# EAGLE board Panel 1 (EAGLE 8.4.1), part 1 of 2
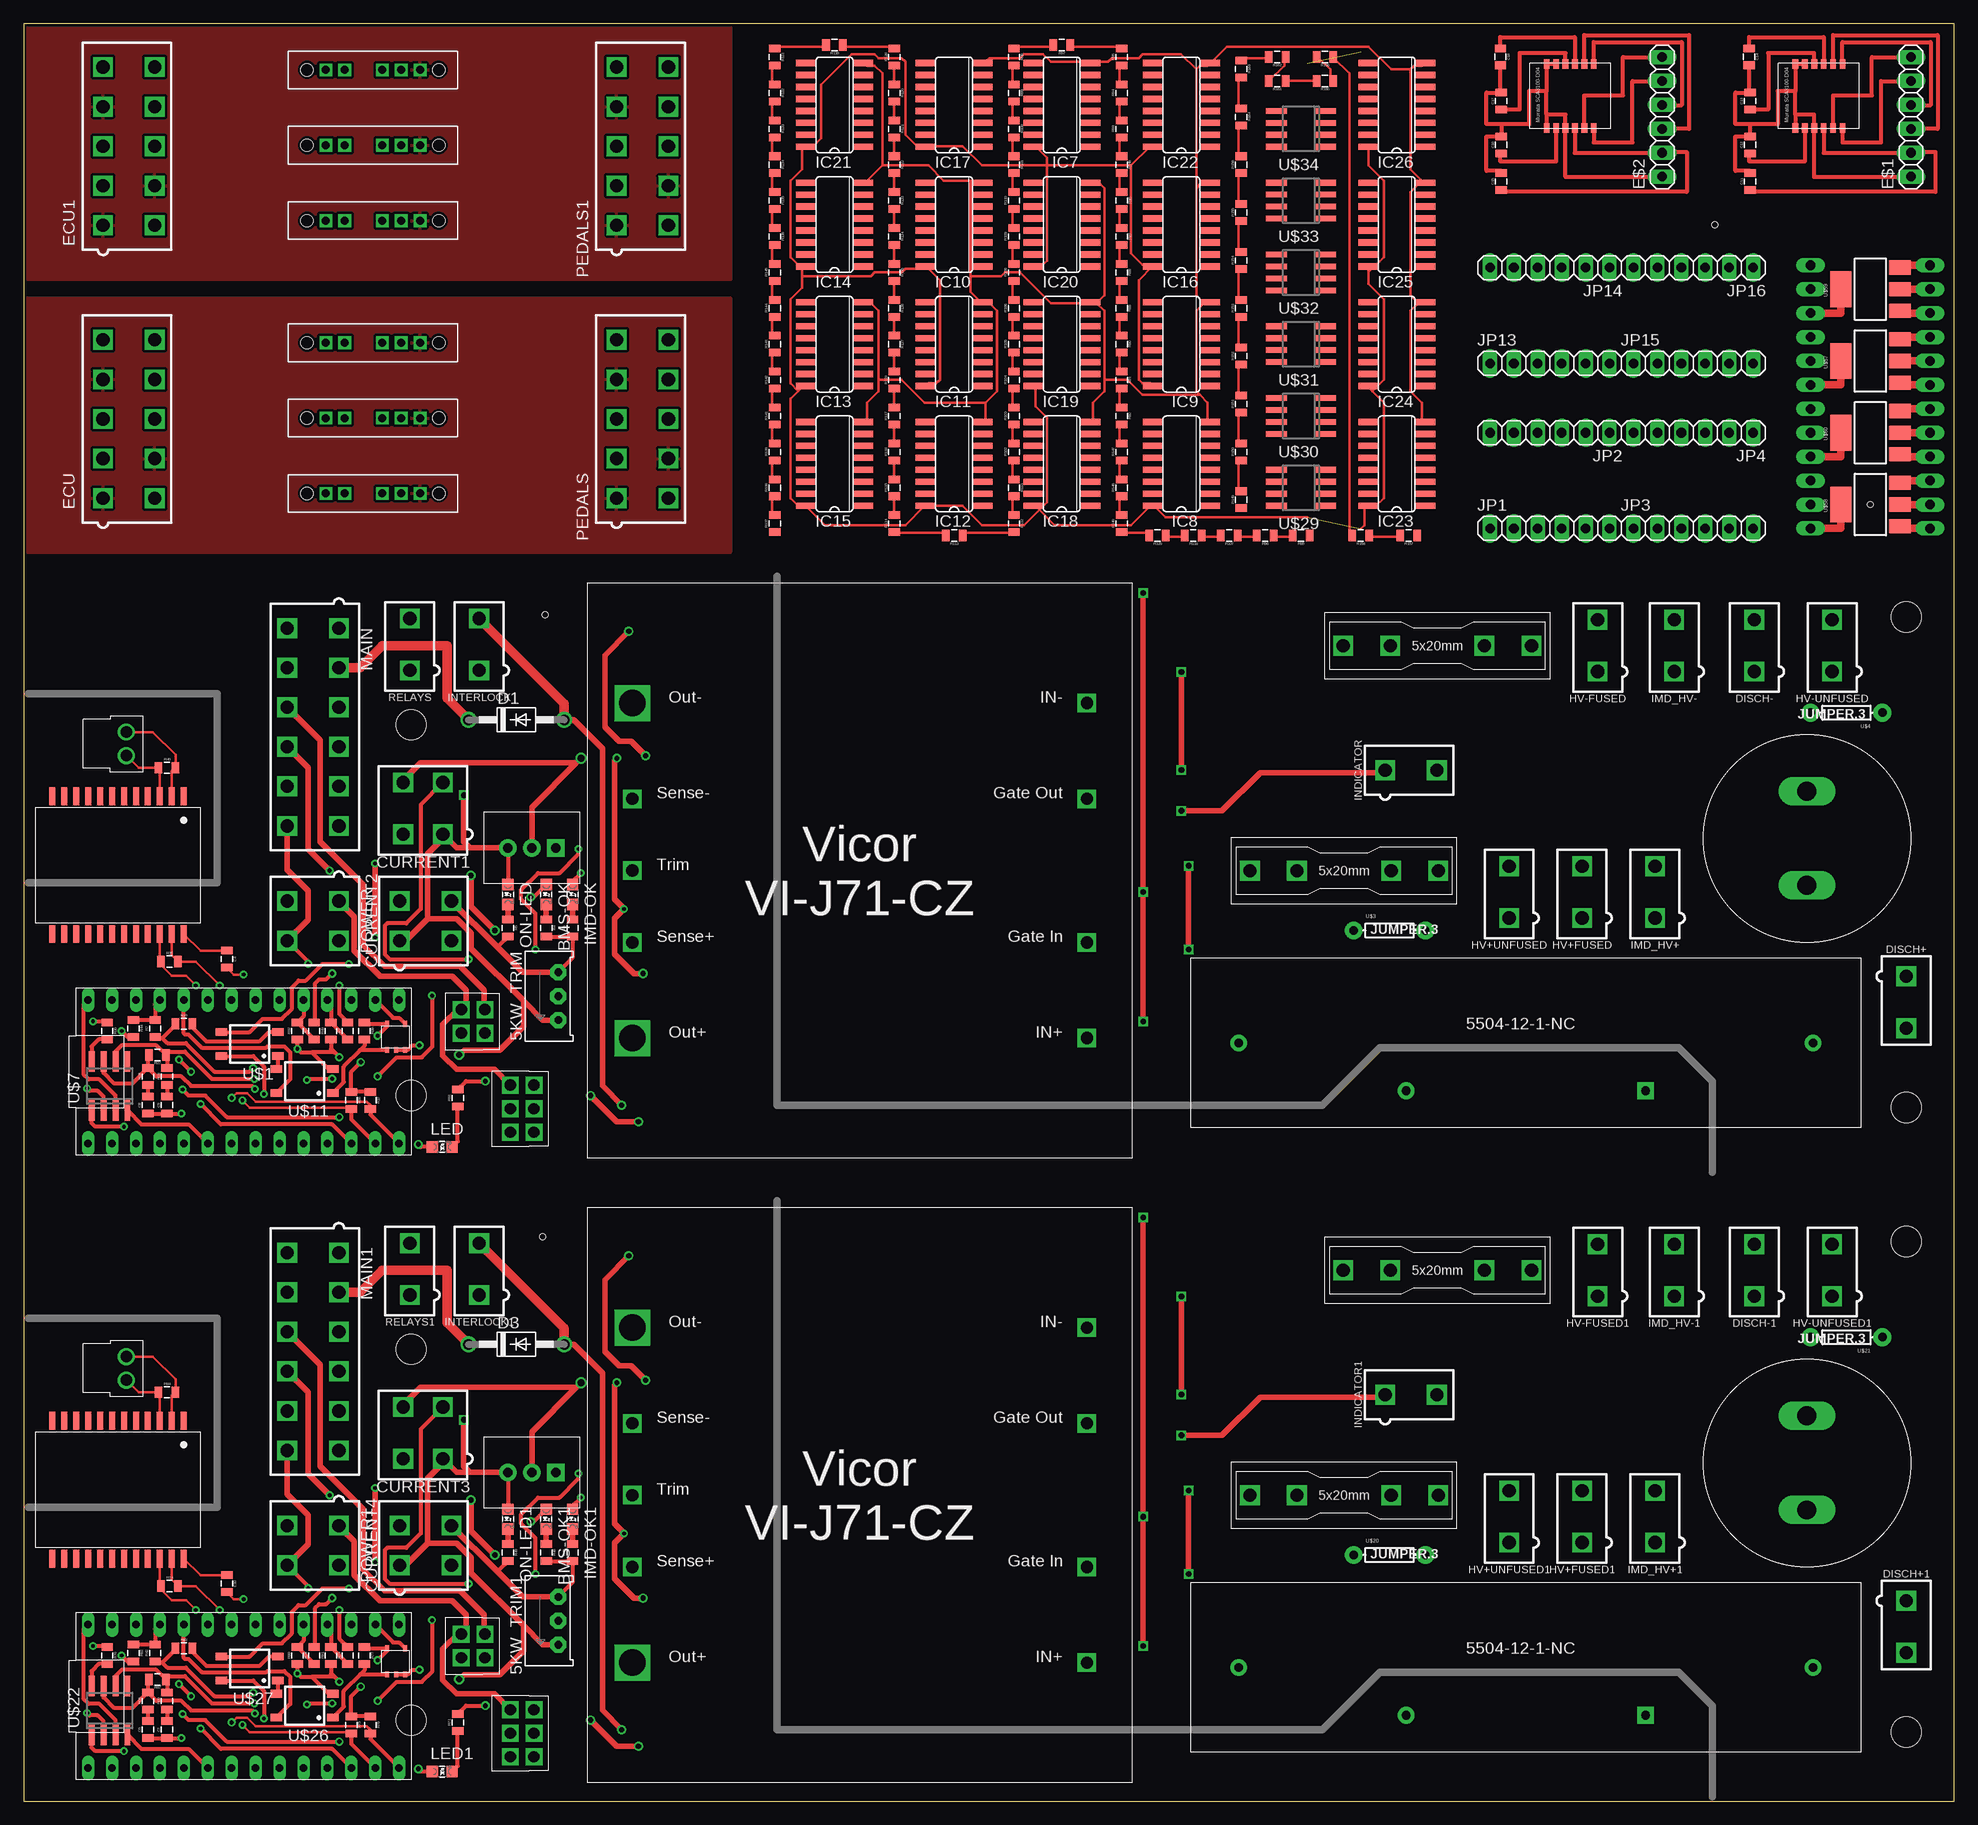
[diagram p0: board, top side]
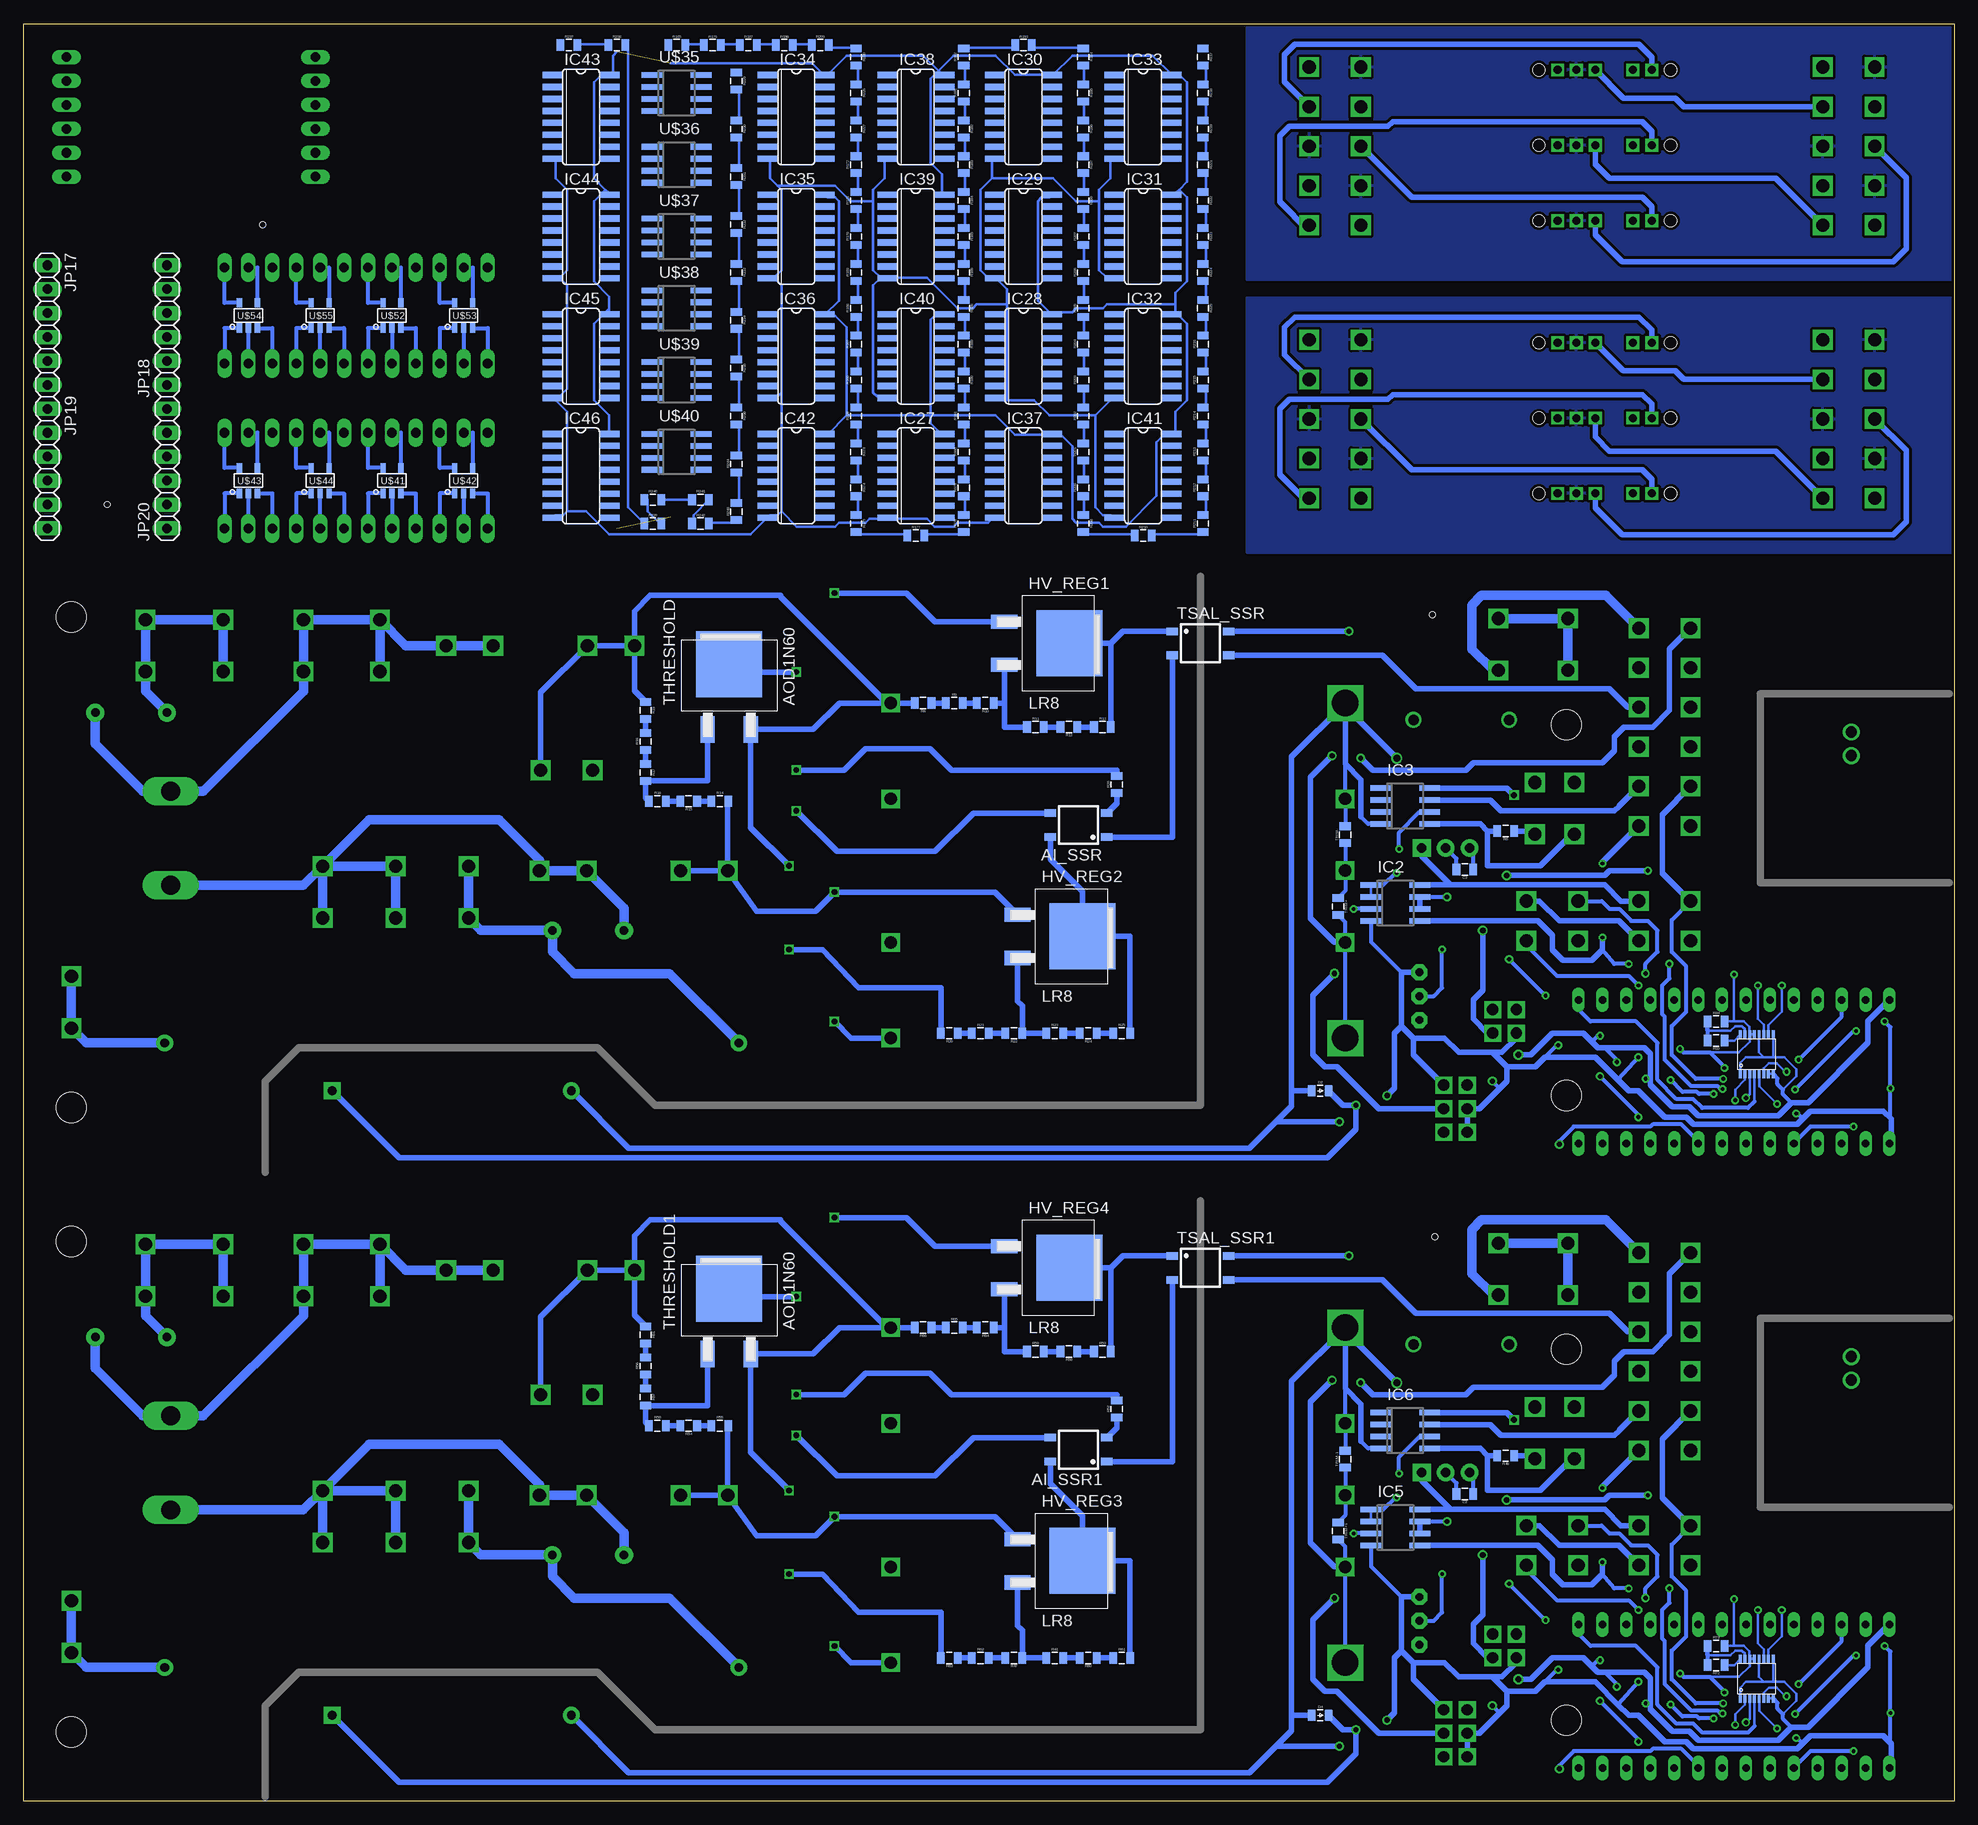
[diagram p1: board, bottom side, seen from below]

Size 204.98 x 188.72 mm. Coordinates in mm from the lower left corner, seen from the top.
Outline: 0,188.72 0,160.53 0,0 204.98,0 204.98,188.72 76.2,188.72 0,188.72
Copper layers (1*16): Top 0.035mm / dielectric 1.5mm / Bottom 0.035mm
Design rules "default *": minimum track width 6mil, minimum drill 15mil, track to track 6mil, track to pad 6mil, pad to pad 6mil, via to via 6mil, smd to smd 6mil, copper to edge 6mil, drill to drill 15mil, minimum pad ring 10mil, minimum via ring 8mil, stop-mask expansion 4mil, vias tented up to drill 0mil, thermal gap 10mil
Holes 3.2 mm at 41.15,114.3 41.15,74.93 199.9,73.66 199.9,125.73 41.15,48.01 41.15,8.64 199.9,7.37 199.9,59.44
Holes 0.64 mm at 179.58,167.39 55.37,125.98 55.12,59.94 196.09,137.67

## Footprints (pad centres in the part's own frame; a part is rotated, then mirrored left to right if it is on the bottom)
TRIMPOT_3296 = drill 0.813 pad 1.676 octagon: 1 2.54,1.27; 2 0,1.27; 3 -2.54,1.27
SOP04 = smd 0.8 x 1.2: 1 -1.27,-3; 2 1.27,-3; 3 1.27,3; 4 -1.27,3
LED-805 = smd 1.2 x 1.2: A 0,-1.05; C 0,1.05
LLS2V221MELZ = drill 2 long: P$1 -5,0; P$2 5,0
0805 = smd 0.8 x 1.2: 1 -0.9,0; 2 0.9,0
MINIFIT_5566-4 = drill 1.4 square: 1 2.1,-2.75; 2 -2.1,-2.75; 3 2.1,2.75; 4 -2.1,2.75
DO-41 = drill 1.118: A 5.08,0; C -5.08,0
0805_D = smd 0.8 x 1.2: A -0.9,0; C 0.9,0
MINIFIT_5566-2 = drill 1.4 square: 1 0,-2.75; 2 0,2.75
1X06 = drill 1.016 long: 1 -6.35,0; 2 -3.81,0; 3 -1.27,0; 4 1.27,0; 5 3.81,0; 6 6.35,0
MINIFIT_5566-10 = drill 1.4 square: 1 8.4,-2.75; 2 4.2,-2.75; 3 0,-2.75; 4 -4.2,-2.75; 5 -8.4,-2.75; 6 8.4,2.75; 7 4.2,2.75; 8 0,2.75; 9 -4.2,2.75; 10 -8.4,2.75
NANO-FIT_VERTICAL-4 = drill 1.2 square: P$1 -1.25,0; P$2 1.25,0; P$3 -1.25,2.5; P$4 1.25,2.5
0751.0110 = drill 1.4 square: L1 -10,0; L2 -5,0; R1 5,0; R2 10,0
TO-252 = smd 1.499 x 2.794: 1 -2.286,0; 3 2.286,0 | smd 7.01 x 7.01: 2(TAB) 0,6.909
TO-220 = drill 1 pad 1.88 square: 1 -2.54,0 | drill 1 pad 1.88: 2 0,0; 3 2.54,0
SOIC-08 = smd 0.6 x 2.2: 1 -1.905,-2.6; 2 -0.635,-2.6; 3 0.635,-2.6; 4 1.905,-2.6; 5 1.905,2.6; 6 0.635,2.6; 7 -0.635,2.6; 8 -1.905,2.6
SO16 = smd 0.66 x 2.032: 1 -4.445,-3.073; 2 -3.175,-3.073; 3 -1.905,-3.073; 4 -0.635,-3.073; 5 0.635,-3.073; 6 1.905,-3.073; 7 3.175,-3.073; 8 4.445,-3.073; 9 4.445,3.073; 10 3.175,3.073; 11 1.905,3.073; 12 0.635,3.073; 13 -0.635,3.073; 14 -1.905,3.073; 15 -3.175,3.073; 16 -4.445,3.073
NANO-FIT_VERTICAL-6 = drill 1.2 square: P$1 -2.5,0; P$2 0,0; P$3 2.5,0; P$4 -2.5,2.5; P$5 0,2.5; P$6 2.5,2.5
NANO-FIT_VERTICAL-2 = drill 1.2: P$1 -1.25,0; P$2 1.25,0
MINIFIT_5566-12 = drill 1.4 square: 1 10.5,-2.75; 2 6.3,-2.75; 3 2.1,-2.75; 4 -2.1,-2.75; 5 -6.3,-2.75; 6 -10.5,-2.75; 7 10.5,2.75; 8 6.3,2.75; 9 2.1,2.75; 10 -2.1,2.75; 11 -6.3,2.75; 12 -10.5,2.75
SM51589PEL = smd 0.635 x 1.905: 1 0,0; 2 1.27,0; 3 2.54,0; 4 3.81,0; 5 5.08,0; 6 6.35,0; 7 7.62,0; 8 8.89,0; 9 10.16,0; 10 11.43,0; 11 12.7,0; 12 13.97,0; 13 13.97,14.605; 14 12.7,14.605; 15 11.43,14.605; 16 10.16,14.605; 17 8.89,14.605; 18 7.62,14.605; 19 6.35,14.605; 20 5.08,14.605; 21 3.81,14.605; 22 2.54,14.605; 23 1.27,14.605; 24 0,14.605
AXIAL-0.3 = drill 0.9 pad 1.88: P$1 -3.81,0; P$2 3.81,0
HV_DCDC_VI-J71-CZ = drill 1.3 square: 1VIN+ 5.08,-12.7; 2GATEIN 5.08,-22.86; 3GATEOUT 5.08,-38.1; 4VIN- 5.08,-48.26; 6SENSE+ 53.34,-22.86; 7TRIM 53.34,-30.48; 8SENSE- 53.34,-38.1 | drill 2.8 square: 5VOUT+ 53.34,-12.7; 9VOUT- 53.34,-48.26
SS-14D0839-VG5PA = drill 0.85 square: 1 -16,6; 2 -14,6; 3 -8,6; 4 -6,6; COM -10,6 | hole 1.3: -18,6; -4,6
MSOP-16 = smd 0.305 x 0.889: 1 -0.1,-0.5; 2 0.4,-0.5; 3 0.9,-0.5; 4 1.4,-0.5; 5 1.9,-0.5; 6 2.4,-0.5; 7 2.9,-0.5; 8 3.4,-0.5; 9 3.4,3.7; 10 2.9,3.7; 11 2.4,3.7; 12 1.9,3.7; 13 1.4,3.7; 14 0.9,3.7; 15 0.4,3.7; 16 -0.1,3.7
TEENSY_3.2_SIMPLE = drill 0.8 long: 3.3V 16.51,29.21; A0 16.51,3.81; A1 16.51,6.35; A2 16.51,8.89; A3 16.51,11.43; A4 16.51,13.97; A5 16.51,16.51; A6 16.51,19.05; A7 16.51,21.59; A8 16.51,24.13; A9 16.51,26.67; AGND 16.51,31.75; D0(RX1) 1.27,31.75; D1(TX1) 1.27,29.21; D2 1.27,26.67; D3(CANTX) 1.27,24.13; D4(CANRX) 1.27,21.59; D5 1.27,19.05; D6 1.27,16.51; D7(RX3) 1.27,13.97; D8(TX3) 1.27,11.43; D9(RX2) 1.27,8.89; D10(TX2) 1.27,6.35; D11 1.27,3.81; D12 1.27,1.27; D13 16.51,1.27; GND 1.27,34.29; VIN 16.51,34.29
SOT23-5 = smd 0.61 x 0.406: EN -2.794,0; GND -2.794,0.94; VCC 0,1.905; WDI 0,0; WDO -2.794,1.905
5504-12-1-NC = drill 0.914 pad 1.778 square: COIL+ 48.26,-14.097 | drill 0.914 pad 1.778: COIL- 22.86,-14.097; CONTACT1 5.08,-9.017; CONTACT2 66.04,-9.017
SOT-23-5 = smd 1 x 0.55: 1 -1.35,0.95; 2 -1.35,0; 3 -1.35,-0.95; 4 1.35,-0.95; 5 1.35,0.95
SCA3100-D04 = smd 0.98 x 0.61: A_EXTC 0.1,-2.8; AVSS 0.1,-1.8; CSB 0.1,-5.8; D_EXTC 6.9,-3.8; DVIO 6.9,-4.8; DVSS 6.9,-2.8; EMC_GND 6.9,-1.8; MISO 0.1,-6.8; MOSI 6.9,-6.8; RESERVED 0.1,-3.8; SCK 6.9,-5.8; VDD 0.1,-4.8
SOT223 = smd 1.5 x 2.235: 1 -2.3,-3.15; 2 0,-3.15; 3 2.3,-3.15 | smd 3.8 x 2.2: 4 0,3.15

## Placement (x,y rotation side)
5KW_TRIM  [TRIMPOT_3296]  55.5,85.47 270 top
5KW_TRIM1  [TRIMPOT_3296]  55.5,19.18 270 top
AI_SSR  CPC1002N  [SOP04]  92.96,103.63 90 bottom
AI_SSR1  CPC1002N  [SOP04]  92.96,37.34 90 bottom
BMS-OK  [LED-805]  55.5,96.27 180 top
BMS-OK1  [LED-805]  55.5,29.97 180 top
C1  220uF  [LLS2V221MELZ]  189.36,102.23 90 top
C2  1uF  [0805]  51.94,32.64 180 bottom
C3  1uF  [0805]  51.94,98.93 180 bottom
C4  27pF  [0805]  21.59,89.41 270 top
C5  220uF  [LLS2V221MELZ]  189.36,35.94 90 top
C6  560pF  [0805]  13.21,7.62 90 top
C7  560pF  [0805]  15.24,7.62 90 top
C8  560pF  [0805]  13.21,73.91 90 top
C9  560pF  [0805]  15.24,73.91 90 top
C10  27pF  [0805]  21.59,23.11 270 top
C11  130 nF  [0805]  183.31,171.96 90 top
C12  130 nF  [0805]  183.31,175.85 90 top
C13  130 nF  [0805]  183.31,180.49 90 top
C14  130 nF  [0805]  183.21,185.2 270 top
C15  130 nF  [0805]  156.89,171.96 90 top
C16  130 nF  [0805]  156.89,175.85 90 top
C17  130 nF  [0805]  156.89,180.49 90 top
C18  130 nF  [0805]  156.8,185.2 270 top
CURRENT1  [MINIFIT_5566-4]  42.42,105.41 0 top
CURRENT2  [MINIFIT_5566-4]  42.67,93.47 270 top
CURRENT3  [MINIFIT_5566-4]  42.42,39.12 0 top
CURRENT4  [MINIFIT_5566-4]  42.67,27.18 270 top
D1  DIODE  [DO-41]  52.32,114.81 0 top
D2  DIODE0805  [0805_D]  67.31,75.44 0 bottom
D3  DIODE  [DO-41]  52.32,48.51 0 top
D4  DIODE0805  [0805_D]  67.31,9.14 0 bottom
DISCH+  DISCHARGE+  [MINIFIT_5566-2]  199.9,84.84 180 top
DISCH+1  DISCHARGE+  [MINIFIT_5566-2]  199.9,18.54 180 top
DISCH-  DISCHARGE -  [MINIFIT_5566-2]  183.77,122.68 0 top
DISCH-1  DISCHARGE -  [MINIFIT_5566-2]  183.77,56.39 0 top
E$1  [1X06]  200.41,178.82 90 top
E$2  [1X06]  173.99,178.82 90 top
ECU  [MINIFIT_5566-10]  11.19,146.74 270 top
ECU1  [MINIFIT_5566-10]  11.19,175.7 270 top
EM  CONNECTOR-4  [NANO-FIT_VERTICAL-4]  46.48,82.8 270 top
EM1  CONNECTOR-4  [NANO-FIT_VERTICAL-4]  46.48,16.51 270 top
FUSE  1A  [0751.0110]  140.21,98.81 180 top
FUSE1  1A  [0751.0110]  150.11,122.68 180 top
FUSE2  1A  [0751.0110]  140.21,32.51 180 top
FUSE3  1A  [0751.0110]  150.11,56.39 180 top
HV+FUSED  [MINIFIT_5566-2]  165.48,96.52 0 top
HV+FUSED1  [MINIFIT_5566-2]  165.48,30.23 0 top
HV+UNFUSED  FSAE  [MINIFIT_5566-2]  157.73,96.52 0 top
HV+UNFUSED1  FSAE  [MINIFIT_5566-2]  157.73,30.23 0 top
HV-FUSED  [MINIFIT_5566-2]  167.13,122.68 0 top
HV-FUSED1  [MINIFIT_5566-2]  167.13,56.39 0 top
HV-UNFUSED  FSAE  [MINIFIT_5566-2]  192.02,122.68 0 top
HV-UNFUSED1  FSAE  [MINIFIT_5566-2]  192.02,56.39 0 top
HV_REG1  LR8  [TO-252]  100.84,122.94 270 bottom
HV_REG2  LR8  [TO-252]  99.44,91.82 270 bottom
HV_REG3  LR8  [TO-252]  99.44,25.53 270 bottom
HV_REG4  LR8  [TO-252]  100.84,56.64 270 bottom
IC1  [TO-220]  53.98,101.22 180 top
IC2  NE5532SOIC  [SOIC-08]  59.31,95.38 270 bottom
IC3  NE5532SOIC  [SOIC-08]  58.29,105.66 270 bottom
IC4  [TO-220]  53.98,34.92 180 top
IC5  NE5532SOIC  [SOIC-08]  59.31,29.08 270 bottom
IC6  NE5532SOIC  [SOIC-08]  58.29,39.37 270 bottom
IC7  74LS258D  [SO16]  110.24,180.09 90 top
IC8  74LS258D  [SO16]  122.94,141.99 90 top
IC9  74LS258D  [SO16]  122.94,154.69 90 top
IC10  74LS258D  [SO16]  98.81,167.39 90 top
IC11  74LS258D  [SO16]  98.81,154.69 90 top
IC12  74LS258D  [SO16]  98.81,141.99 90 top
IC13  74LS258D  [SO16]  86.11,154.69 90 top
IC14  74LS258D  [SO16]  86.11,167.39 90 top
IC15  74LS258D  [SO16]  86.11,141.99 90 top
IC16  74LS258D  [SO16]  122.94,167.39 90 top
IC17  74LS258D  [SO16]  98.81,180.09 90 top
IC18  74LS258D  [SO16]  110.24,141.99 90 top
IC19  74LS258D  [SO16]  110.24,154.69 90 top
IC20  74LS258D  [SO16]  110.24,167.39 90 top
IC21  74LS258D  [SO16]  86.11,180.09 90 top
IC22  74LS258D  [SO16]  122.94,180.09 90 top
IC23  74LS258D  [SO16]  145.8,141.99 90 top
IC24  74LS258D  [SO16]  145.8,154.69 90 top
IC25  74LS258D  [SO16]  145.8,167.39 90 top
IC26  74LS258D  [SO16]  145.8,180.09 90 top
IC27  74LS258D  [SO16]  110.24,140.72 270 bottom
IC28  74LS258D  [SO16]  98.81,153.42 270 bottom
IC29  74LS258D  [SO16]  98.81,166.12 270 bottom
IC30  74LS258D  [SO16]  98.81,178.82 270 bottom
IC31  74LS258D  [SO16]  86.11,166.12 270 bottom
IC32  74LS258D  [SO16]  86.11,153.42 270 bottom
IC33  74LS258D  [SO16]  86.11,178.82 270 bottom
IC34  74LS258D  [SO16]  122.94,178.82 270 bottom
IC35  74LS258D  [SO16]  122.94,166.12 270 bottom
IC36  74LS258D  [SO16]  122.94,153.42 270 bottom
IC37  74LS258D  [SO16]  98.81,140.72 270 bottom
IC38  74LS258D  [SO16]  110.24,178.82 270 bottom
IC39  74LS258D  [SO16]  110.24,166.12 270 bottom
IC40  74LS258D  [SO16]  110.24,153.42 270 bottom
IC41  74LS258D  [SO16]  86.11,140.72 270 bottom
IC42  74LS258D  [SO16]  122.94,140.72 270 bottom
IC43  74LS258D  [SO16]  145.8,178.82 270 bottom
IC44  74LS258D  [SO16]  145.8,166.12 270 bottom
IC45  74LS258D  [SO16]  145.8,153.42 270 bottom
IC46  74LS258D  [SO16]  145.8,140.72 270 bottom
IMD  CONNECTOR-6  [NANO-FIT_VERTICAL-6]  51.69,73.53 270 top
IMD1  CONNECTOR-6  [NANO-FIT_VERTICAL-6]  51.69,7.24 270 top
IMD-OK  [LED-805]  58.29,96.27 180 top
IMD-OK1  [LED-805]  58.29,29.97 180 top
IMD_HV+  [MINIFIT_5566-2]  173.23,96.52 0 top
IMD_HV+1  [MINIFIT_5566-2]  173.23,30.23 0 top
IMD_HV-  [MINIFIT_5566-2]  175.26,122.68 0 top
IMD_HV-1  [MINIFIT_5566-2]  175.26,56.39 0 top
INDICATOR  [MINIFIT_5566-2]  147.32,109.47 270 top
INDICATOR1  [MINIFIT_5566-2]  147.32,43.18 270 top
INTERLOCK  [MINIFIT_5566-2]  48.39,122.81 0 top
INTERLOCK1  [MINIFIT_5566-2]  48.39,56.52 0 top
ISOSPI  CONNECTOR-2  [NANO-FIT_VERTICAL-2]  10.92,112.27 270 top
ISOSPI1  CONNECTOR-2  [NANO-FIT_VERTICAL-2]  10.92,45.97 270 top
JP1  [1X06]  162.05,135.13 0 top
JP2  [1X06]  162.05,145.29 180 top
JP3  [1X06]  177.29,135.13 0 top
JP4  [1X06]  177.29,145.29 180 top
JP13  [1X06]  162.05,152.65 0 top
JP14  [1X06]  162.05,162.81 180 top
JP15  [1X06]  177.29,152.65 0 top
JP16  [1X06]  177.29,162.81 180 top
JP17  [1X06]  202.44,156.72 270 bottom
JP18  [1X06]  189.74,156.72 90 bottom
JP19  [1X06]  202.44,141.48 270 bottom
JP20  [1X06]  189.74,141.48 90 bottom
LED  [LED-805]  44.45,69.47 270 top
LED1  [LED-805]  44.45,3.17 270 top
MAIN  [MINIFIT_5566-12]  30.73,114.05 90 top
MAIN1  [MINIFIT_5566-12]  30.73,47.75 90 top
ON-LED  [LED-805]  51.44,96.27 180 top
ON-LED1  [LED-805]  51.44,29.97 180 top
PEDALS  [MINIFIT_5566-10]  65.72,146.74 270 top
PEDALS1  [MINIFIT_5566-10]  65.72,175.7 270 top
POWER  [MINIFIT_5566-4]  30.73,93.47 90 top
POWER1  [MINIFIT_5566-4]  30.73,27.18 90 top
R1  1k  [0805]  30.86,81.79 90 top
R2  1k  [0805]  34.42,81.79 90 top
R3  [0805]  58.29,92.71 90 top
R4  [0805]  55.5,92.71 270 top
R5  100  [0805]  51.44,92.71 270 top
R6  10k  [0805]  47.62,103 180 bottom
R7  2k  [0805]  13.97,82.04 90 top
R8  8.2k  [0805]  109.47,116.59 180 bottom
R9  8.2k  [0805]  106.17,116.59 0 bottom
R10  8.2k  [0805]  102.87,116.59 180 bottom
R11  2k  [0805]  97.54,114.05 0 bottom
R12  2k  [0805]  93.98,114.05 180 bottom
R13  2k  [0805]  90.42,114.05 0 bottom
R14  500k  [0805]  131.06,106.17 0 bottom
R15  500k  [0805]  134.37,106.17 180 bottom
R16  500k  [0805]  137.67,106.17 0 bottom
R17  40k  [0805]  138.94,109.22 270 bottom
R18  40k  [0805]  138.94,112.52 90 bottom
R19  40k  [0805]  138.94,115.82 270 bottom
R20  20k  [0805]  106.68,81.53 180 bottom
R21  20k  [0805]  103.38,81.53 0 bottom
R22  20k  [0805]  99.82,81.53 180 bottom
R23  2k  [0805]  95.5,81.53 0 bottom
R24  2k  [0805]  91.95,81.53 180 bottom
R25  2k  [0805]  88.39,81.53 0 bottom
R26  1k  [0805]  88.9,107.95 90 bottom
R27  120  [0805]  14.22,79.25 180 top
R28  100  [0805]  13.21,76.96 90 top
R29  100  [0805]  15.24,76.96 90 top
R30  1k  [0805]  8.89,81.79 270 top
R31  [0805]  46.1,74.68 90 top
R32  2k  [0805]  29.08,81.79 90 top
R33  1k  [0805]  25.27,80.77 180 bottom
R34  1k  [0805]  25.27,82.8 0 bottom
R35  120  [0805]  15.49,89.15 0 top
R36  2k  [0805]  34.8,74.42 270 top
R37  2k  [0805]  36.83,74.42 270 top
R38  68  [0805]  36.2,81.79 270 top
R39  200  [0805]  17.02,82.55 0 top
R40  100  [0805]  15.24,109.73 0 top
R41  2k  [0805]  95.5,15.24 0 bottom
R42  2k  [0805]  13.97,15.75 90 top
R43  2k  [0805]  32.64,81.79 90 top
R44  1k  [0805]  11.68,82.04 270 top
R45  [0805]  58.29,26.42 90 top
R46  [0805]  55.5,26.42 270 top
R47  20k  [0805]  99.82,15.24 180 bottom
R48  10k  [0805]  47.62,36.7 180 bottom
R49  100  [0805]  51.44,26.42 270 top
R50  500k  [0805]  137.67,39.88 0 bottom
R51  40k  [0805]  138.94,49.53 270 bottom
R52  1k  [0805]  88.9,41.66 90 bottom
R53  2k  [0805]  90.42,47.75 0 bottom
R54  500k  [0805]  134.37,39.88 180 bottom
R55  500k  [0805]  131.06,39.88 0 bottom
R56  40k  [0805]  138.94,46.23 90 bottom
R57  40k  [0805]  138.94,42.93 270 bottom
R58  2k  [0805]  93.98,47.75 180 bottom
R59  2k  [0805]  97.54,47.75 0 bottom
R60  2k  [0805]  91.95,15.24 180 bottom
R61  2k  [0805]  88.39,15.24 0 bottom
R62  20k  [0805]  103.38,15.24 0 bottom
R63  20k  [0805]  106.68,15.24 180 bottom
R64  8.2k  [0805]  102.87,50.29 180 bottom
R65  8.2k  [0805]  106.17,50.29 0 bottom
R66  8.2k  [0805]  109.47,50.29 180 bottom
R67  120  [0805]  14.22,12.95 180 top
R68  100  [0805]  13.21,10.67 90 top
R69  100  [0805]  15.24,10.67 90 top
R70  1k  [0805]  8.89,15.49 270 top
R71  [0805]  46.1,8.38 90 top
R72  1k  [0805]  25.27,14.48 180 bottom
R73  1k  [0805]  25.27,16.51 0 bottom
R74  120  [0805]  15.49,22.86 0 top
R75  2k  [0805]  34.8,8.13 270 top
R76  2k  [0805]  36.83,8.13 270 top
R77  68  [0805]  36.2,15.49 270 top
R78  1k  [0805]  30.86,15.49 90 top
R79  1k  [0805]  34.42,15.49 90 top
R80  2k  [0805]  29.08,15.49 90 top
R81  2k  [0805]  32.64,15.49 90 top
R82  1k  [0805]  11.68,15.75 270 top
R83  200  [0805]  17.02,16.26 0 top
R84  100  [0805]  15.24,43.43 0 top
R85  [0805]  135.64,134.37 180 top
R86  [0805]  116.59,169.93 270 top
R87  [0805]  116.59,166.12 270 top
R88  [0805]  116.59,162.31 270 top
R89  [0805]  116.59,158.5 270 top
R90  [0805]  116.59,154.69 270 top
R91  [0805]  116.59,150.88 270 top
R92  [0805]  116.59,147.07 270 top
R93  [0805]  116.59,177.55 90 top
R94  [0805]  116.59,181.36 90 top
R95  [0805]  116.59,185.17 90 top
R96  [0805]  131.83,134.37 180 top
R97  [0805]  110.24,186.44 180 top
R98  [0805]  105.16,185.17 270 top
R99  [0805]  105.16,181.36 270 top
R100  [0805]  105.16,177.55 270 top
R101  [0805]  105.16,173.74 270 top
R102  [0805]  105.16,143.26 90 top
R103  [0805]  105.16,147.07 90 top
R104  [0805]  105.16,150.88 90 top
R105  [0805]  105.16,154.69 90 top
R106  [0805]  105.16,158.5 90 top
R107  [0805]  128.02,134.37 180 top
R108  [0805]  105.16,162.31 90 top
R109  [0805]  105.16,166.12 90 top
R110  [0805]  105.16,169.93 90 top
R111  [0805]  105.16,139.45 270 top
R112  [0805]  105.16,135.64 270 top
R113  [0805]  98.81,134.37 180 top
R114  [0805]  92.46,135.64 90 top
R115  [0805]  92.46,139.45 90 top
R116  [0805]  92.46,143.26 90 top
R117  [0805]  92.46,147.07 90 top
R118  [0805]  124.21,134.37 180 top
R119  [0805]  92.46,150.88 90 top
R120  [0805]  92.46,181.36 270 top
R121  [0805]  92.46,177.55 270 top
R122  [0805]  92.46,173.74 270 top
R123  [0805]  92.46,169.93 270 top
R124  [0805]  92.46,166.12 270 top
R125  [0805]  92.46,162.31 270 top
R126  [0805]  92.46,158.5 270 top
R127  [0805]  92.46,154.69 270 top
R128  [0805]  92.46,185.17 90 top
R129  [0805]  120.4,134.37 180 top
R130  [0805]  86.11,186.44 180 top
R131  [0805]  79.76,185.17 270 top
R132  [0805]  79.76,181.36 270 top
R133  [0805]  79.76,177.55 270 top
R134  [0805]  79.76,173.74 270 top
R135  [0805]  79.76,169.93 270 top
R136  [0805]  79.76,166.12 270 top
R137  [0805]  79.76,135.64 90 top
R138  [0805]  79.76,139.45 90 top
R139  [0805]  79.76,143.26 90 top
R140  [0805]  116.59,135.64 90 top
R141  [0805]  79.76,147.07 90 top
R142  [0805]  79.76,150.88 90 top
R143  [0805]  79.76,154.69 90 top
R144  [0805]  79.76,158.5 90 top
R145  [0805]  79.76,162.31 90 top
R146  [0805]  116.59,139.45 90 top
R147  [0805]  116.59,143.26 90 top
R148  [0805]  116.59,173.74 270 top
R149  [0805]  129.29,138.18 90 top
R150  [0805]  129.29,143.26 90 top
R151  [0805]  129.29,148.34 90 top
R152  [0805]  129.29,153.42 90 top
R153  [0805]  129.29,158.5 90 top
R154  [0805]  129.29,163.58 90 top
R155  [0805]  129.29,168.66 90 top
R156  [0805]  129.29,173.74 90 top
R157  [0805]  147.07,134.37 180 top
R158  [0805]  141.99,134.37 180 top
R159  [0805]  138.18,185.17 180 top
R160  [0805]  138.18,182.63 180 top
R161  [0805]  133.1,182.63 180 top
R162  [0805]  133.1,185.17 180 top
R163  [0805]  129.29,183.9 270 top
R164  [0805]  129.29,178.82 270 top
R165  [0805]  135.64,186.44 0 bottom
R166  [0805]  116.59,150.88 90 bottom
R167  [0805]  116.59,154.69 90 bottom
R168  [0805]  116.59,158.5 90 bottom
R169  [0805]  116.59,162.31 90 bottom
R170  [0805]  116.59,166.12 90 bottom
R171  [0805]  116.59,169.93 90 bottom
R172  [0805]  116.59,173.74 90 bottom
R173  [0805]  116.59,143.26 270 bottom
R174  [0805]  116.59,139.45 270 bottom
R175  [0805]  116.59,135.64 270 bottom
R176  [0805]  131.83,186.44 0 bottom
R177  [0805]  110.24,134.37 0 bottom
R178  [0805]  105.16,135.64 90 bottom
R179  [0805]  105.16,139.45 90 bottom
R180  [0805]  105.16,143.26 90 bottom
R181  [0805]  105.16,147.07 90 bottom
R182  [0805]  105.16,177.55 270 bottom
R183  [0805]  105.16,173.74 270 bottom
R184  [0805]  105.16,169.93 270 bottom
R185  [0805]  105.16,166.12 270 bottom
R186  [0805]  105.16,162.31 270 bottom
R187  [0805]  128.02,186.44 0 bottom
R188  [0805]  105.16,158.5 270 bottom
R189  [0805]  105.16,154.69 270 bottom
R190  [0805]  105.16,150.88 270 bottom
R191  [0805]  105.16,181.36 90 bottom
R192  [0805]  105.16,185.17 90 bottom
R193  [0805]  98.81,186.44 0 bottom
R194  [0805]  92.46,185.17 270 bottom
R195  [0805]  92.46,181.36 270 bottom
R196  [0805]  92.46,177.55 270 bottom
R197  [0805]  92.46,173.74 270 bottom
R198  [0805]  124.21,186.44 0 bottom
R199  [0805]  92.46,169.93 270 bottom
R200  [0805]  92.46,139.45 90 bottom
R201  [0805]  92.46,143.26 90 bottom
R202  [0805]  92.46,147.07 90 bottom
R203  [0805]  92.46,150.88 90 bottom
R204  [0805]  92.46,154.69 90 bottom
R205  [0805]  92.46,158.5 90 bottom
R206  [0805]  92.46,162.31 90 bottom
R207  [0805]  92.46,166.12 90 bottom
R208  [0805]  92.46,135.64 270 bottom
R209  [0805]  120.4,186.44 0 bottom
R210  [0805]  86.11,134.37 0 bottom
R211  [0805]  79.76,135.64 90 bottom
R212  [0805]  79.76,139.45 90 bottom
R213  [0805]  79.76,143.26 90 bottom
R214  [0805]  79.76,147.07 90 bottom
R215  [0805]  79.76,150.88 90 bottom
R216  [0805]  79.76,154.69 90 bottom
R217  [0805]  79.76,185.17 270 bottom
R218  [0805]  79.76,181.36 270 bottom
R219  [0805]  79.76,177.55 270 bottom
R220  [0805]  116.59,185.17 270 bottom
R221  [0805]  79.76,173.74 270 bottom
R222  [0805]  79.76,169.93 270 bottom
R223  [0805]  79.76,166.12 270 bottom
R224  [0805]  79.76,162.31 270 bottom
R225  [0805]  79.76,158.5 270 bottom
R226  [0805]  116.59,181.36 270 bottom
R227  [0805]  116.59,177.55 270 bottom
R228  [0805]  116.59,147.07 90 bottom
R229  [0805]  129.29,182.63 270 bottom
R230  [0805]  129.29,177.55 270 bottom
R231  [0805]  129.29,172.47 270 bottom
R232  [0805]  129.29,167.39 270 bottom
R233  [0805]  129.29,162.31 270 bottom
R234  [0805]  129.29,157.23 270 bottom
R235  [0805]  129.29,152.15 270 bottom
R236  [0805]  129.29,147.07 270 bottom
R237  [0805]  147.07,186.44 0 bottom
R238  [0805]  141.99,186.44 0 bottom
R239  [0805]  138.18,135.64 0 bottom
R240  [0805]  138.18,138.18 0 bottom
R241  [0805]  133.1,138.18 0 bottom
R242  [0805]  133.1,135.64 0 bottom
R243  [0805]  129.29,136.91 90 bottom
R244  [0805]  129.29,141.99 90 bottom
RELAYS  [MINIFIT_5566-2]  41.02,122.81 0 top
RELAYS1  [MINIFIT_5566-2]  41.02,56.52 0 top
THRESHOLD  AOD1N60  [TO-252]  130.05,113.79 0 bottom
THRESHOLD1  AOD1N60  [TO-252]  130.05,47.5 0 bottom
TRIM+  [0805]  65.41,95 270 bottom
TRIM+1  [0805]  65.41,28.7 270 bottom
TRIM-  [0805]  64.64,102.62 90 bottom
TRIM-1  [0805]  64.64,36.32 90 bottom
TSAL_SSR  CPC1002N  [SOP04]  80.01,122.94 270 bottom
TSAL_SSR1  CPC1002N  [SOP04]  80.01,56.64 270 bottom
U$1  [SOP04]  24,80.39 90 top
U$2  SM51589PEL  [SM51589PEL]  17.02,106.68 180 top
U$3  JUMPER.3  [AXIAL-0.3]  145.03,92.46 0 top
U$4  JUMPER.3  [AXIAL-0.3]  193.55,115.57 180 top
U$5  HV_DCDC_VI-J71-CZ  [HV_DCDC_VI-J71-CZ]  117.98,68.33 180 top
U$6  SS-14D0839-VG5PA  [SS-14D0839-VG5PA]  48.1,148.84 0 top
U$7  MCP2551  [SOIC-08]  9.14,75.95 0 top
U$8  LTC6820  [MSOP-16]  22.61,77.72 0 bottom
U$9  TEENSY_3.2_SIMPLE  [TEENSY_3.2_SIMPLE]  41.15,68.58 90 top
U$10  STWD100  [SOT23-5]  40.51,82.55 90 top
U$11  [SOP04]  29.84,76.45 90 top
U$12  5504-12-1-NC  [5504-12-1-NC]  123.95,89.53 0 top
U$13  SS-14D0839-VG5PA  [SS-14D0839-VG5PA]  48.1,140.84 0 top
U$14  SS-14D0839-VG5PA  [SS-14D0839-VG5PA]  48.1,132.84 0 top
U$15  SS-14D0839-VG5PA  [SS-14D0839-VG5PA]  48.1,177.8 0 top
U$16  SS-14D0839-VG5PA  [SS-14D0839-VG5PA]  48.1,169.8 0 top
U$17  SS-14D0839-VG5PA  [SS-14D0839-VG5PA]  48.1,161.8 0 top
U$18  5504-12-1-NC  [5504-12-1-NC]  123.95,23.24 0 top
U$19  HV_DCDC_VI-J71-CZ  [HV_DCDC_VI-J71-CZ]  117.98,2.03 180 top
U$20  JUMPER.3  [AXIAL-0.3]  145.03,26.16 0 top
U$21  JUMPER.3  [AXIAL-0.3]  193.55,49.28 180 top
U$22  MCP2551  [SOIC-08]  9.14,9.65 0 top
U$23  LTC6820  [MSOP-16]  22.61,11.43 0 bottom
U$24  TEENSY_3.2_SIMPLE  [TEENSY_3.2_SIMPLE]  41.15,2.29 90 top
U$25  STWD100  [SOT23-5]  40.51,16.26 90 top
U$26  [SOP04]  29.84,10.16 90 top
U$27  [SOP04]  24,14.1 90 top
U$28  SM51589PEL  [SM51589PEL]  17.02,40.39 180 top
U$29  MCP2551  [SOIC-08]  135.64,139.45 90 top
U$30  MCP2551  [SOIC-08]  135.64,147.07 90 top
U$31  MCP2551  [SOIC-08]  135.64,154.69 90 top
U$32  MCP2551  [SOIC-08]  135.64,162.31 90 top
U$33  MCP2551  [SOIC-08]  135.64,169.93 90 top
U$34  MCP2551  [SOIC-08]  135.64,177.55 90 top
U$35  MCP2551  [SOIC-08]  135.64,181.36 270 bottom
U$36  MCP2551  [SOIC-08]  135.64,173.74 270 bottom
U$37  MCP2551  [SOIC-08]  135.64,166.12 270 bottom
U$38  MCP2551  [SOIC-08]  135.64,158.5 270 bottom
U$39  MCP2551  [SOIC-08]  135.64,150.88 270 bottom
U$40  MCP2551  [SOIC-08]  135.64,143.26 270 bottom
U$41  SN74LVC1G06  [SOT-23-5]  165.86,140.21 90 bottom
U$42  SN74LVC1G07  [SOT-23-5]  158.24,140.21 90 bottom
U$43  SN74LVC1G06  [SOT-23-5]  181.1,140.21 90 bottom
U$44  SN74LVC1G07  [SOT-23-5]  173.48,140.21 90 bottom
U$45  SCA3100-D04  [SCA3100-D04]  186.33,177.53 90 top
U$52  SN74LVC1G06  [SOT-23-5]  165.86,157.73 90 bottom
U$53  SN74LVC1G07  [SOT-23-5]  158.24,157.73 90 bottom
U$54  SN74LVC1G06  [SOT-23-5]  181.1,157.73 90 bottom
U$55  SN74LVC1G07  [SOT-23-5]  173.48,157.73 90 bottom
U$56  SCA3100-D04  [SCA3100-D04]  159.91,177.53 90 top
U$57  SOT223  [SOT223]  196.09,152.91 90 top
U$58  SOT223  [SOT223]  196.09,137.67 90 top
U$59  SOT223  [SOT223]  196.09,160.53 90 top
U$60  SOT223  [SOT223]  196.09,145.29 90 top

## Library data of the parts
5KW_TRIM 5KW_TRIM1 AI_SSR AI_SSR1 BMS-OK BMS-OK1 C1-C18 D1-D4 E$1 E$2 EM EM1 FUSE FUSE1-FUSE3 HV_REG1-HV_REG4 IC1-IC6 IMD IMD1 IMD-OK IMD-OK1 ISOSPI ISOSPI1 JP1-JP4 JP13-JP20 LED LED1 ON-LED ON-LED1 R1-R244 THRESHOLD THRESHOLD1 TRIM+ TRIM+1 TRIM- TRIM-1 TSAL_SSR TSAL_SSR1 U$1-U$45 U$52-U$60 = HyTechDevices
CURRENT1-CURRENT4 ECU ECU1 MAIN MAIN1 PEDALS PEDALS1 POWER POWER1 = HyTechDevices; OC_FARNELL: unknown; OC_NEWARK: unknown
DISCH+ DISCH+1 DISCH- DISCH-1 HV+FUSED HV+FUSED1 HV+UNFUSED HV+UNFUSED1 HV-FUSED HV-FUSED1 HV-UNFUSED HV-UNFUSED1 IMD_HV+ IMD_HV+1 IMD_HV- IMD_HV-1 INDICATOR INDICATOR1 INTERLOCK INTERLOCK1 RELAYS RELAYS1 = HyTechDevices; OC_FARNELL: 1822072; OC_NEWARK: unknown
IC7-IC46 = 74xx-us

## Nets
5KW_TRIG: 5KW_TRIM.2 IC3.6
5KW_TRIG1: 5KW_TRIM1.2 IC6.6
+3V1: U$23.6 U$24.3.3V
+3V3: U$8.6 U$9.3.3V
+5V: 5KW_TRIM.1 C3.1 CURRENT1.1 CURRENT2.1 IC1.3 IC3.8 ON-LED.A R6.1 R36.1 R37.1 R38.1 U$1.4 U$7.3 U$8.1 U$8.7 U$8.8 U$8.9 U$8.12 U$9.VIN U$10.VCC
+5V1: ECU.1 ECU.4 ECU.7 PEDALS.1 PEDALS.4 PEDALS.7 U$6.4 U$13.4 U$14.4
+5V3: 5KW_TRIM1.1 C2.1 CURRENT3.1 CURRENT4.1 IC4.3 IC6.8 ON-LED1.A R48.1 R75.1 R76.1 R77.1 U$22.3 U$23.1 U$23.7 U$23.8 U$23.9 U$23.12 U$24.VIN U$25.VCC U$27.4
+5V4: ECU1.1 ECU1.4 ECU1.7 PEDALS1.1 PEDALS1.4 PEDALS1.7 U$15.4 U$16.4 U$17.4
+12V: EM.P$1 IC1.1 IC2.8 IMD.P$1 POWER.1
+12V1: EM1.P$1 IC4.1 IC5.8 IMD1.P$1 POWER1.1
BMS_OK: IC2.5 MAIN.6 U$1.3
BMS_OK1: IC5.5 MAIN1.6 U$27.3
BMS_WATCH: U$1.1 U$11.3
BMS_WATCH1: U$26.3 U$27.1
BSPD_CUR_FAULT: IC3.7 MAIN.5
BSPD_CUR_FAULT1: IC6.7 MAIN1.5
CANH: MAIN.12 POWER.4 R27.2 R28.2 U$7.7
CANH1: MAIN1.12 POWER1.4 R67.2 R68.2 U$22.7
CANL: MAIN.11 POWER.3 R27.1 R29.2 U$7.6
CANL1: MAIN1.11 POWER1.3 R67.1 R69.2 U$22.6
CS: U$8.5 U$9.D10(TX2)
CS1: U$23.5 U$24.D10(TX2)
CUR_SENSE_1: CURRENT1.2 IC3.5 R6.2
CUR_SENSE_2: R1.1 R32.2 U$9.A3
CUR_SENSE_3: CURRENT3.2 IC6.5 R48.2
CUR_SENSE_4: R78.1 R80.2 U$24.A3
DISCHARGE1: HV+UNFUSED.1 HV+UNFUSED.2 U$3.P$2 U$12.CONTACT1
DISCHARGE2: DISCH+.1 DISCH+.2 U$12.CONTACT2
DISCHARGE3: DISCH-.1 DISCH-.2 HV-UNFUSED.1 HV-UNFUSED.2 U$4.P$2
DISCHARGE4: DISCH+1.1 DISCH+1.2 U$18.CONTACT2
DISCHARGE5: HV+UNFUSED1.1 HV+UNFUSED1.2 U$18.CONTACT1 U$20.P$2
DISCHARGE6: DISCH-1.1 DISCH-1.2 HV-UNFUSED1.1 HV-UNFUSED1.2 U$21.P$2
EM_IO1: EM.P$3 MAIN.9
EM_IO2: EM.P$4 MAIN.10
EM_IO3: EM1.P$3 MAIN1.9
EM_IO4: EM1.P$4 MAIN1.10
GND: 5KW_TRIM.3 C3.2 C4.2 C8.1 C9.1 CURRENT1.4 CURRENT2.4 D2.A EM.P$2 IC1.2 IC2.4 IC3.4 IMD.P$2 IMD.P$3 IMD.P$4 POWER.2 R3.1 R4.2 R5.2 R7.1 R30.1 R31.2 R32.1 R34.2 R39.1 R43.1 TRIM-.2 U$5.8SENSE- U$5.9VOUT- U$7.2 U$8.13 U$8.14 U$9.GND U$10.EN U$10.GND U$11.2 U$12.COIL-
GND1: ECU.2 ECU.5 ECU.8 PEDALS.2 PEDALS.5 PEDALS.8 U$6.3 U$13.3 U$14.3
GND2: ECU1.2 ECU1.5 ECU1.8 PEDALS1.2 PEDALS1.5 PEDALS1.8 U$15.3 U$16.3 U$17.3
GND3: 5KW_TRIM1.3 C2.2 C6.1 C7.1 C10.2 CURRENT3.4 CURRENT4.4 D4.A EM1.P$2 IC4.2 IC5.4 IC6.4 IMD1.P$2 IMD1.P$3 IMD1.P$4 POWER1.2 R42.1 R45.1 R46.2 R49.2 R70.1 R71.2 R73.2 R80.1 R81.1 R83.1 TRIM-1.2 U$18.COIL- U$19.8SENSE- U$19.9VOUT- U$22.2 U$23.13 U$23.14 U$24.GND U$25.EN U$25.GND U$26.2
GND4: IC7.8 IC8.8 IC9.8 IC10.8 IC11.8 IC12.8 IC13.8 IC14.8 IC15.8 IC16.8 IC17.8 IC18.8 IC19.8 IC20.8 IC21.8 IC22.8 IC23.8 IC24.8 IC25.8 IC26.8
GND5: IC27.8 IC28.8 IC29.8 IC30.8 IC31.8 IC32.8 IC33.8 IC34.8 IC35.8 IC36.8 IC37.8 IC38.8 IC39.8 IC40.8 IC41.8 IC42.8 IC43.8 IC44.8 IC45.8 IC46.8
GND6: C11.2 C12.2 C13.2 C14.2 U$45.AVSS U$45.DVSS U$45.EMC_GND U$45.RESERVED
GND7: C15.2 C16.2 C17.2 C18.2 U$56.AVSS U$56.DVSS U$56.EMC_GND U$56.RESERVED
HV+FUSED: C1.P$1 FUSE.L1 FUSE.L2 HV+FUSED.1 HV+FUSED.2 IMD_HV+.1 IMD_HV+.2 U$3.P$1
HV+FUSED1: C5.P$1 FUSE2.L1 FUSE2.L2 HV+FUSED1.1 HV+FUSED1.2 IMD_HV+1.1 IMD_HV+1.2 U$20.P$1
HV+FUSED_1A: FUSE.R1 FUSE.R2 HV_REG1.1 HV_REG2.1 R14.2 U$5.1VIN+
HV+FUSED_1A1: FUSE2.R1 FUSE2.R2 HV_REG3.1 HV_REG4.1 R55.2 U$19.1VIN+
HV-FUSED: C1.P$2 FUSE1.L1 FUSE1.L2 HV-FUSED.1 HV-FUSED.2 IMD_HV-.1 IMD_HV-.2 U$4.P$1
HV-FUSED1: C5.P$2 FUSE3.L1 FUSE3.L2 HV-FUSED1.1 HV-FUSED1.2 IMD_HV-1.1 IMD_HV-1.2 U$21.P$1
HV-FUSED_1A: FUSE1.R1 FUSE1.R2 INDICATOR.2 R8.2 R19.1 R20.2 THRESHOLD.3 U$5.4VIN-
HV-FUSED_1A1: FUSE3.R1 FUSE3.R2 INDICATOR1.2 R51.1 R63.2 R66.2 THRESHOLD1.3 U$19.4VIN-
ISOSPI-M: ISOSPI.P$2 R40.1 U$2.3
ISOSPI-M1: ISOSPI1.P$2 R84.1 U$28.3
ISOSPI-P: ISOSPI.P$1 R40.2 U$2.2
ISOSPI-P1: ISOSPI1.P$1 R84.2 U$28.2
MISO: R37.2 U$8.3 U$9.D12
MISO1: R76.2 U$23.3 U$24.D12
MOSI: R36.2 U$8.2 U$9.D11
MOSI1: R75.2 U$23.2 U$24.D11
N$1: AI_SSR.4 HV_REG2.2(TAB) R25.2
N$2: HV_REG1.2(TAB) R13.2 TSAL_SSR.1
N$3: ON-LED.C R5.1
N$4: R39.2 U$1.2
N$5: AI_SSR.2 R26.1
N$6: AI_SSR.1 TSAL_SSR.2
N$7: AI_SSR.3 INDICATOR.1
N$8: R8.1 R9.1
N$9: R26.2 THRESHOLD.2(TAB)
N$10: R14.1 R15.1
N$11: R15.2 R16.2
N$12: R17.1 R18.1
N$13: R18.2 R19.2
N$14: R9.2 R10.2
N$15: HV_REG2.3 R22.1 R23.1
N$16: R11.2 R12.2
N$17: R12.1 R13.1
N$18: HV_REG1.3 R10.1 R11.1
N$19: R23.2 R24.2
N$20: R24.1 R25.1
N$21: R21.2 R22.2
N$22: R16.1 R17.2 THRESHOLD.1
N$23: R20.1 R21.1
N$24: ECU.9 U$6.COM
N$25: U$7.1 U$9.D3(CANTX)
N$26: R30.2 U$7.8
N$27: C8.2 R28.1
N$28: C9.2 R29.1
N$29: LED.C R31.1
N$30: CURRENT2.2 R1.2
N$31: R33.1 U$8.16
N$32: R33.2 R34.1 U$8.15
N$33: R35.1 U$2.22 U$8.10
N$34: R35.2 U$2.23 U$8.11
N$35: C4.1 U$2.24
N$36: U$7.4 U$9.D4(CANRX)
N$37: LED.A U$9.D7(RX3)
N$38: R38.2 U$10.WDO U$11.1
N$39: ECU.6 U$13.COM
N$40: U$9.A8 U$11.4
N$41: ECU.3 U$14.COM
N$42: IC2.1 IC2.2 IMD-OK.A
N$43: BMS-OK.A IC2.6 IC2.7
N$44: BMS-OK.C R4.1
N$45: IMD-OK.C R3.2
N$46: PEDALS.9 U$6.1
N$47: PEDALS.6 U$13.1
N$48: PEDALS.3 U$14.1
N$49: ECU1.9 U$15.COM
N$50: U$9.A0 U$10.WDI
N$51: ECU1.6 U$16.COM
N$52: ECU1.3 U$17.COM
N$53: CURRENT1.3 R44.2
N$54: CURRENT2.3 R2.2
N$55: PEDALS1.9 U$15.1
N$56: PEDALS1.6 U$16.1
N$57: PEDALS1.3 U$17.1
N$58: AI_SSR1.4 HV_REG3.2(TAB) R61.2
N$59: HV_REG3.3 R41.1 R47.1
N$60: IC5.1 IC5.2 IMD-OK1.A
N$61: BMS-OK1.A IC5.6 IC5.7
N$62: BMS-OK1.C R46.1
N$63: IMD-OK1.C R45.2
N$64: ON-LED1.C R49.1
N$65: HV_REG4.2(TAB) R53.2 TSAL_SSR1.1
N$66: R54.1 R55.1
N$67: R50.2 R54.2
N$68: R56.1 R57.1
N$69: R51.2 R56.2
N$70: AI_SSR1.2 R52.1
N$71: AI_SSR1.1 TSAL_SSR1.2
N$72: AI_SSR1.3 INDICATOR1.1
N$73: HV_REG4.3 R59.1 R64.1
N$74: R64.2 R65.2
N$75: R65.1 R66.1
N$76: R50.1 R57.2 THRESHOLD1.1
N$77: R58.2 R59.2
N$78: R53.1 R58.1
N$79: R52.2 THRESHOLD1.2(TAB)
N$80: R41.2 R60.2
N$81: R60.1 R61.1
N$82: R47.2 R62.2
N$83: R62.1 R63.1
N$84: U$22.1 U$24.D3(CANTX)
N$85: R70.2 U$22.8
N$86: C6.2 R68.1
N$87: C7.2 R69.1
N$88: LED1.C R71.1
N$89: R72.1 U$23.16
N$90: R72.2 R73.1 U$23.15
N$91: R74.1 U$23.10 U$28.22
N$92: R74.2 U$23.11 U$28.23
N$93: C10.1 U$28.24
N$94: U$22.4 U$24.D4(CANRX)
N$95: LED1.A U$24.D7(RX3)
N$96: R77.2 U$25.WDO U$26.1
N$97: U$24.A8 U$26.4
N$98: U$24.A0 U$25.WDI
N$99: CURRENT4.2 R78.2
N$100: CURRENT4.3 R79.2
N$101: CURRENT3.3 R82.2
N$102: R83.2 U$27.2
N$103: R85.2 R96.1
N$104: R96.2 R107.1
N$105: R107.2 R118.1
N$106: R129.2 R140.1
N$107: R140.2 R146.1
N$108: R146.2 R147.1
N$109: R118.2 R129.1
N$110: R86.1 R148.2
N$111: R86.2 R87.1
N$112: R87.2 R88.1
N$113: R89.2 R90.1
N$114: R90.2 R91.1
N$115: R91.2 R92.1
N$116: R88.2 R89.1
N$117: R92.2 R147.2
N$118: R93.2 R94.1
N$119: R94.2 R95.1
N$120: R95.2 R97.1
N$121: R98.2 R99.1
N$122: R99.2 R100.1
N$123: R100.2 R101.1
N$124: R97.2 R98.1
N$125: R102.2 R103.1
N$126: R103.2 R104.1
N$127: R104.2 R105.1
N$128: R106.2 R108.1
N$129: R108.2 R109.1
N$130: R109.2 R110.1
N$131: R105.2 R106.1
N$132: R101.2 R110.2
N$133: R93.1 R148.1
N$134: R111.2 R112.1
N$135: R112.2 R113.1
N$136: R113.2 R114.1
N$137: R115.2 R116.1
N$138: R116.2 R117.1
N$139: R117.2 R119.1
N$140: R114.2 R115.1
N$141: R120.2 R121.1
N$142: R121.2 R122.1
N$143: R122.2 R123.1
N$144: R124.2 R125.1
N$145: R125.2 R126.1
N$146: R126.2 R127.1
N$147: R123.2 R124.1
N$148: R119.2 R127.2
N$149: R128.2 R130.1
N$150: R130.2 R131.1
N$151: R131.2 R132.1
N$152: R133.2 R134.1
N$153: R134.2 R135.1
N$154: R135.2 R136.1
N$155: R132.2 R133.1
N$156: R137.2 R138.1
N$157: R138.2 R139.1
N$158: R139.2 R141.1
N$159: R142.2 R143.1
N$160: R143.2 R144.1
N$161: R144.2 R145.1
N$162: R141.2 R142.1
N$163: R136.2 R145.2
N$164: R120.1 R128.1
N$165: R102.1 R111.1
N$166: R149.2 R150.1
N$167: R150.2 R151.1
N$168: R151.2 R152.1
N$169: R153.2 R154.1
N$170: R154.2 R155.1
N$171: R155.2 R156.1
N$172: R152.2 R153.1
N$173: R157.2 R158.1
N$174: R158.2 R159.1
N$175: R159.2 R160.1
N$176: R161.2 R162.1
N$177: R162.2 R163.1
N$178: R163.2 R164.1
N$179: R160.2 R161.1
N$180: R156.2 R164.2
N$181: R165.2 R176.1
N$182: R176.2 R187.1
N$183: R187.2 R198.1
N$184: R209.2 R220.1
N$185: R220.2 R226.1
N$186: R226.2 R227.1
N$187: R198.2 R209.1
N$188: R166.1 R228.2
N$189: R166.2 R167.1
N$190: R167.2 R168.1
N$191: R169.2 R170.1
N$192: R170.2 R171.1
N$193: R171.2 R172.1
N$194: R168.2 R169.1
N$195: R172.2 R227.2
N$196: R173.2 R174.1
N$197: R174.2 R175.1
N$198: R175.2 R177.1
N$199: R178.2 R179.1
N$200: R179.2 R180.1
N$201: R180.2 R181.1
N$202: R177.2 R178.1
N$203: R182.2 R183.1
N$204: R183.2 R184.1
N$205: R184.2 R185.1
N$206: R186.2 R188.1
N$207: R188.2 R189.1
N$208: R189.2 R190.1
N$209: R185.2 R186.1
N$210: R181.2 R190.2
N$211: R173.1 R228.1
N$212: R191.2 R192.1
N$213: R192.2 R193.1
N$214: R193.2 R194.1
N$215: R195.2 R196.1
N$216: R196.2 R197.1
N$217: R197.2 R199.1
N$218: R194.2 R195.1
N$219: R200.2 R201.1
N$220: R201.2 R202.1
N$221: R202.2 R203.1
N$222: R204.2 R205.1
N$223: R205.2 R206.1
N$224: R206.2 R207.1
N$225: R203.2 R204.1
N$226: R199.2 R207.2
N$227: R208.2 R210.1
N$228: R210.2 R211.1
N$229: R211.2 R212.1
N$230: R213.2 R214.1
N$231: R214.2 R215.1
N$232: R215.2 R216.1
N$233: R212.2 R213.1
N$234: R217.2 R218.1
N$235: R218.2 R219.1
N$236: R219.2 R221.1
N$237: R222.2 R223.1
N$238: R223.2 R224.1
N$239: R224.2 R225.1
N$240: R221.2 R222.1
N$241: R216.2 R225.2
N$242: R200.1 R208.1
N$243: R182.1 R191.1
N$244: R229.2 R230.1
N$245: R230.2 R231.1
N$246: R231.2 R232.1
N$247: R233.2 R234.1
N$248: R234.2 R235.1
N$249: R235.2 R236.1
N$250: R232.2 R233.1
N$251: R237.2 R238.1
N$252: R238.2 R239.1
N$253: R239.2 R240.1
N$254: R241.2 R242.1
N$255: R242.2 R243.1
N$256: R243.2 R244.1
N$257: R240.2 R241.1
N$258: R236.2 R244.2
N$259: JP2.1 U$41.5
N$260: JP2.2 U$41.4
N$261: JP2.4 U$42.5
N$262: JP2.5 U$42.4
N$263: JP1.6 U$41.1
N$264: JP1.5 U$41.2
N$265: JP1.4 U$41.3
N$266: JP1.3 U$42.1
N$267: JP1.2 U$42.2
N$268: JP1.1 U$42.3
N$269: JP4.1 U$43.5
N$270: JP4.2 U$43.4
N$271: JP4.4 U$44.5
N$272: JP4.5 U$44.4
N$273: JP3.6 U$43.1
N$274: JP3.5 U$43.2
N$275: JP3.4 U$43.3
N$276: JP3.3 U$44.1
N$277: JP3.2 U$44.2
N$278: JP3.1 U$44.3
N$279: C12.1 U$45.A_EXTC
N$280: C13.1 U$45.D_EXTC
N$281: C14.1 U$45.DVIO
N$282: U$45.MOSI
N$283: U$45.CSB
N$284: U$45.MISO
N$285: U$45.SCK
N$334: JP14.1 U$52.5
N$335: JP14.2 U$52.4
N$336: JP14.4 U$53.5
N$337: JP14.5 U$53.4
N$338: JP13.6 U$52.1
N$339: JP13.5 U$52.2
N$340: JP13.4 U$52.3
N$341: JP13.3 U$53.1
N$342: JP13.2 U$53.2
N$343: JP13.1 U$53.3
N$344: JP16.1 U$54.5
N$345: JP16.2 U$54.4
N$346: JP16.4 U$55.5
N$347: JP16.5 U$55.4
N$348: JP15.6 U$54.1
N$349: JP15.5 U$54.2
N$350: JP15.4 U$54.3
N$351: JP15.3 U$55.1
N$352: JP15.2 U$55.2
N$353: JP15.1 U$55.3
N$354: C16.1 U$56.A_EXTC
N$355: C17.1 U$56.D_EXTC
N$356: C18.1 U$56.DVIO
N$357: U$56.MOSI
N$358: U$56.CSB
N$359: U$56.MISO
N$360: U$56.SCK
N$361: JP18.1 U$57.4
N$362: JP17.6 U$57.1
N$363: JP17.5 U$57.2
N$364: JP17.4 U$57.3
N$365: JP17.3 U$59.1
N$366: JP17.2 U$59.2
N$367: JP17.1 U$59.3
N$368: JP18.4 U$59.4
N$369: JP20.1 U$58.4
N$370: JP20.4 U$60.4
N$371: JP19.6 U$58.1
N$372: JP19.5 U$58.2
N$373: JP19.4 U$58.3
N$374: JP19.3 U$60.1
N$375: JP19.2 U$60.2
N$376: JP19.1 U$60.3
OKHS: IC2.3 IMD.P$5 MAIN.7
OKHS1: IC5.3 IMD1.P$5 MAIN1.7
SCK: U$8.4 U$9.D13
SCK1: U$23.4 U$24.D13
SHUTDOWN1: D3.A D4.C INTERLOCK1.2 RELAYS1.1 RELAYS1.2 U$18.COIL+
SHUTDOWN2: INTERLOCK1.1 MAIN1.1
SHUTDOWN6: INTERLOCK.1 MAIN.1
SHUTDOWN7: D1.A D2.C INTERLOCK.2 RELAYS.1 RELAYS.2 U$12.COIL+
SHUTDOWN7_EXT_OUT: D1.C MAIN.2
SHUTDOWN7_EXT_OUT1: D3.C MAIN1.2
TEMP_SENSE_1: R7.2 R44.1 U$9.A9
TEMP_SENSE_2: R2.1 R43.2 U$9.A2
TEMP_SENSE_3: R79.1 R81.2 U$24.A2
TEMP_SENSE_4: R42.2 R82.1 U$24.A9
TRIM: TRIM+.1 TRIM-.1 U$5.7TRIM
TRIM1: TRIM+1.1 TRIM-1.1 U$19.7TRIM
TSAL+: MAIN.3 TSAL_SSR.3
TSAL+1: MAIN1.3 TSAL_SSR1.3
TSAL_1: TRIM+.2 TSAL_SSR.4 U$5.5VOUT+ U$5.6SENSE+
TSAL_2: TRIM+1.2 TSAL_SSR1.4 U$19.5VOUT+ U$19.6SENSE+
VCC: IC7.16 IC8.16 IC9.16 IC10.16 IC11.16 IC12.16 IC13.16 IC14.16 IC15.16 IC16.16 IC17.16 IC18.16 IC19.16 IC20.16 IC21.16 IC22.16 IC23.16 IC24.16 IC25.16 IC26.16
VCC1: IC27.16 IC28.16 IC29.16 IC30.16 IC31.16 IC32.16 IC33.16 IC34.16 IC35.16 IC36.16 IC37.16 IC38.16 IC39.16 IC40.16 IC41.16 IC42.16 IC43.16 IC44.16 IC45.16 IC46.16
VDD: C11.1 U$45.VDD
VDD1: C15.1 U$56.VDD

## Tracks (layer width: path | path; a pad name or v marks a point on that pad's centre or on a via)
5KW_TRIG  (via drill 0.4)
  Top 0.406: v54.36,90.42 54.36,94.23 52.83,95.76 52.83,96.77 54.61,98.55 56.9,98.55 58.93,100.58 v58.93,101.09
  Bottom 0.406: 5KW_TRIM.2 55.24,85.47 54.36,86.36 v54.36,90.42 | IC3.6 56.75,105.03 58.93,102.85 v58.93,101.09
5KW_TRIG1  (via drill 0.4)
  Top 0.406: v54.36,24.13 54.36,27.94 52.83,29.46 52.83,30.48 54.61,32.26 56.9,32.26 58.93,34.29 v58.93,34.8
  Bottom 0.406: 5KW_TRIM1.2 55.24,19.18 54.36,20.07 v54.36,24.13 | IC6.6 56.75,38.73 58.93,36.55 v58.93,34.8
+3V1  (via drill 0.4)
  Top 0.406: v17.79,11.16 v16.51,12.45
  Bottom 0.254: U$23.6 20.21,11.54 19.68,12.06 18.8,12.06 17.9,11.16 v17.79,11.16
  Bottom 0.406: U$24.3.3V 11.94,17.02 v16.51,12.45
+3V3  (via drill 0.4)
  Top 0.406: v17.79,77.46 v16.51,78.74
  Bottom 0.254: U$8.6 20.21,77.84 19.68,78.36 18.8,78.36 17.9,77.46 v17.79,77.46
  Bottom 0.406: U$9.3.3V 11.94,83.31 v16.51,78.74
+5V  (via drill 0.4, 0.45, 0.6, 0.65)
  Top 0.406: IC1.3 ON-LED.A | R37.1 R36.1 34.8,77.47 v35.81,78.49 | R38.1 35.95,82.55 U$10.VCC 38.61,82.3 v37.59,81.28 | U$7.3 9.78,74.93 8.06,76.65 6.92,76.65 6.35,77.22 6.35,84.58 U$9.VIN | U$1.4 24.38,79.12 25.53,77.97 v25.53,75.11 | v30.1,76.58 30.23,76.71 v32.77,76.71
  Top 0.61: v46.74,106.81 46.74,101.85 47.37,101.22 | 47.37,101.22 IC1.3 | 42.9,93.7 42.93,93.73 42.93,100.58 44.52,102.18 CURRENT1.1 45.96,101.22 47.37,101.22 | 42.9,93.7 40.57,91.37 CURRENT2.1 | 42.9,93.7 46,93.7 47.52,92.18 47.52,90.53 53.09,84.97 | 53.09,84.97 53.09,82.3 50.55,79.76 46.76,79.76 v46.25,79.25 | 5KW_TRIM.1 55.13,82.93 53.09,84.97
  Bottom 0.254: U$8.1 22.71,78.39 22.1,78.99 20.19,78.99 | 20.19,78.99 19.25,78.99 | U$8.12 20.71,79.51 20.19,78.99 | U$8.9 19.21,79.03 19.25,78.99 | 19.25,78.99 18.03,78.99 16.76,77.72 16.76,76.96 18.16,75.56 | U$8.8 U$8.7
  Bottom 0.406: C3.1 51.04,100.83 IC1.3 | U$8.8 18.74,76.76 18.74,76.15 18.16,75.56 18.16,75.06 17.27,74.17 | v35.81,78.49 35.81,78.74 37.08,80.01 | v37.59,81.28 37.85,81.28 38.48,80.64 | v30.1,76.58 28.83,75.31 27.3,75.31 27.1,75.11 v25.53,75.11 | v32.77,76.71 32.26,76.71
  Bottom 0.61: IC3.8 47.5,107.57 v46.74,106.81 | CURRENT1.1 44.85,103 R6.1 | v46.25,79.25 44.96,79.25 42.67,81.53 39.37,81.53 38.48,80.64 37.85,80.01 37.08,80.01 32.89,80.01 32.26,79.38 32.26,76.71 32.26,76.07 29.91,73.72 28.13,73.72 27.18,72.77 18.67,72.77 17.27,74.17 15.49,74.17 9.14,80.52 9.14,82.8 U$9.VIN
+5V1
  pour Top (isolate 0.305): 0.1,159.57 0.1,132.62 75.1,132.62 75.1,159.57
+5V3  (via drill 0.4, 0.45, 0.6, 0.65)
  Top 0.406: IC4.3 ON-LED1.A | R76.1 R75.1 34.8,11.18 v35.81,12.19 | R77.1 35.95,16.26 U$25.VCC 38.61,16 v37.59,14.99 | U$22.3 9.78,8.64 8.06,10.36 6.92,10.36 6.35,10.92 6.35,18.29 U$24.VIN | U$27.4 24.38,12.83 25.53,11.68 v25.53,8.81 | v30.1,10.29 30.23,10.41 v32.77,10.41
  Top 0.61: v46.74,40.51 46.74,35.56 47.37,34.92 | 47.37,34.92 IC4.3 | 42.9,27.41 42.93,27.43 42.93,34.29 44.52,35.88 CURRENT3.1 45.96,34.92 47.37,34.92 | 42.9,27.41 40.57,25.08 CURRENT4.1 | 42.9,27.41 46,27.41 47.52,25.88 47.52,24.24 53.09,18.68 | 53.09,18.68 53.09,16 50.55,13.46 46.76,13.46 v46.25,12.95 | 5KW_TRIM1.1 55.13,16.64 53.09,18.68
  Bottom 0.254: U$23.1 22.71,12.09 22.1,12.7 20.19,12.7 | 20.19,12.7 19.25,12.7 | U$23.12 20.71,13.22 20.19,12.7 | U$23.9 19.21,12.74 19.25,12.7 | 19.25,12.7 18.03,12.7 16.76,11.43 16.76,10.67 18.16,9.27 | U$23.8 U$23.7
  Bottom 0.406: C2.1 51.04,34.53 IC4.3 | U$23.8 18.74,10.47 18.74,9.85 18.16,9.27 18.16,8.76 17.27,7.87 | v35.81,12.19 35.81,12.45 37.08,13.72 | v37.59,14.99 37.85,14.99 38.48,14.35 | v30.1,10.29 28.83,9.02 27.3,9.02 27.1,8.81 v25.53,8.81 | v32.77,10.41 32.26,10.41
  Bottom 0.61: IC6.8 47.5,41.27 v46.74,40.51 | CURRENT3.1 44.85,36.7 R48.1 | v46.25,12.95 44.96,12.95 42.67,15.24 39.37,15.24 38.48,14.35 37.85,13.72 37.08,13.72 32.89,13.72 32.26,13.08 32.26,10.41 32.26,9.78 29.91,7.43 28.13,7.43 27.18,6.48 18.67,6.48 17.27,7.87 15.49,7.87 9.14,14.22 9.14,16.51 U$24.VIN
+5V4
  pour Top (isolate 0.305): 0.1,188.53 0.1,161.58 75.1,161.58 75.1,188.53
+12V
  Top 0.61: POWER.1 35.13,93.93 35.13,90.31 37.86,87.58 45.52,87.58 46.99,86.11 46.99,84.56 EM.P$1 46.1,84.05 44.52,82.48 44.52,79.18 45.97,77.72 50,77.72 IMD.P$1
  Bottom 0.61: 53.48,97.28 IC2.8 | 53.48,97.28 37.08,97.28 35.37,95.57 POWER.1 | IC1.1 56.52,100.32 53.48,97.28
+12V1
  Top 0.61: POWER1.1 35.13,27.63 35.13,24.02 37.86,21.29 45.52,21.29 46.99,19.81 46.99,18.27 EM1.P$1 46.1,17.76 44.52,16.18 44.52,12.88 45.97,11.43 50,11.43 IMD1.P$1
  Bottom 0.61: 53.48,30.99 IC5.8 | 53.48,30.99 37.08,30.99 35.37,29.28 POWER1.1 | IC4.1 56.52,34.03 53.48,30.99
BMS_OK  (via drill 0.4)
  Top 0.406: v34.54,88.9 31.75,88.9 29.97,87.12 29.21,87.12 28.45,86.36 28.45,84.07 27.43,83.06 25.4,83.06 24,81.66 U$1.3
  Top 0.61: v37.34,99.57 v37.34,91.69
  Bottom 0.406: v34.54,88.9 36.09,88.9 37.34,90.4
  Bottom 0.61: IC2.5 44.2,93.47 42.67,91.95 42.67,90.42 41.52,89.27 38.47,89.27 37.34,90.4 v37.34,91.69 | MAIN.6 37.34,99.69 v37.34,99.57
BMS_OK1  (via drill 0.4)
  Top 0.406: v34.54,22.61 31.75,22.61 29.97,20.83 29.21,20.83 28.45,20.07 28.45,17.78 27.43,16.76 25.4,16.76 24,15.37 U$27.3
  Top 0.61: v37.34,33.27 v37.34,25.4
  Bottom 0.406: v34.54,22.61 36.09,22.61 37.34,24.11
  Bottom 0.61: IC5.5 44.2,27.18 42.67,25.65 42.67,24.13 41.52,22.98 38.47,22.98 37.34,24.11 v37.34,25.4 | MAIN1.6 37.34,33.4 v37.34,33.27
BMS_WATCH
  Top 0.406: U$1.1 27,77.88 U$11.3
BMS_WATCH1
  Top 0.406: U$27.1 27,11.59 U$26.3
BSPD_CUR_FAULT
  Bottom 0.61: IC3.7 49.26,106.3 48.11,105.16 36.07,105.16 35.56,105.66 35.56,105.67 MAIN.5
BSPD_CUR_FAULT1
  Bottom 0.61: IC6.7 49.26,40.01 48.11,38.86 36.07,38.86 35.56,39.37 35.56,39.38 MAIN1.5
CANH  (via drill 0.4, 0.45)
  Top 0.406: v30.23,88.9 30.23,89.13 POWER.4 | U$7.7 8.51,77.34 9.65,76.2 11.55,76.2 R28.2 | R27.2 13.21,79.13 R28.2 | R28.2 14.11,76.96 16.76,76.96 17.78,75.95 24.26,75.95 v24.57,75.63
  Top 0.61: POWER.4 30.23,93.61 30.23,96.65 27.98,98.89 MAIN.12
  Bottom 0.406: v30.23,88.9 30.23,87.38 30.99,86.61 30.99,83.57 30.73,83.31 30.73,78.74 27.94,75.95 25.15,75.95 24.83,75.63 v24.57,75.63
CANH1  (via drill 0.4, 0.45)
  Top 0.406: v30.23,22.61 30.23,22.84 POWER1.4 | U$22.7 8.51,11.05 9.65,9.91 11.55,9.91 R68.2 | R67.2 13.21,12.84 R68.2 | R68.2 14.11,10.67 16.76,10.67 17.78,9.65 24.26,9.65 v24.57,9.34
  Top 0.61: POWER1.4 30.23,27.32 30.23,30.35 27.98,32.59 MAIN1.12
  Bottom 0.406: v30.23,22.61 30.23,21.08 30.99,20.32 30.99,17.27 30.73,17.02 30.73,12.45 27.94,9.65 25.15,9.65 24.83,9.34 v24.57,9.34
CANL  (via drill 0.4)
  Top 0.406: U$7.6 9.78,79.63 10.41,80.26 14.11,80.26 R27.1 | R27.1 15.24,79.13 R29.2 | R27.1 15.47,79.6 17.11,79.6 20,76.71 v24.51,76.71 v24.51,76.7
  Bottom 0.406: 27.98,95.55 29.97,93.56 29.97,90.17 28.45,88.65 28.45,83.82 29.97,82.3 29.97,79.25 27.43,76.7 v24.51,76.7
  Bottom 0.61: POWER.3 27.98,95.55 30.99,98.55 30.99,104.74 MAIN.11
CANL1  (via drill 0.4)
  Top 0.406: U$22.6 9.78,13.34 10.41,13.97 14.11,13.97 R67.1 | R67.1 15.24,12.84 R69.2 | R67.1 15.47,13.3 17.11,13.3 20,10.41 v24.51,10.41
  Bottom 0.406: 27.98,29.25 29.97,27.27 29.97,23.88 28.45,22.35 28.45,17.53 29.97,16 29.97,12.95 27.43,10.41 v24.51,10.41
  Bottom 0.61: POWER1.3 27.98,29.25 30.99,32.26 30.99,38.45 MAIN1.11
CS  (via drill 0.4)
  Top 0.406: U$9.D10(TX2) 32.77,71.88 20.95,71.88 v18.8,74.04
  Bottom 0.254: U$8.5 20.69,77.21 20.69,75.93 v18.8,74.04
CS1  (via drill 0.4)
  Top 0.406: U$24.D10(TX2) 32.77,5.59 20.95,5.59 v18.8,7.75
  Bottom 0.254: U$23.5 20.69,10.91 20.69,9.64 v18.8,7.75
CUR_SENSE_1
  Bottom 0.61: 49.53,103 49.53,99.31 43.92,99.31 40.57,102.66 CURRENT1.2 | IC3.5 50.29,103.76 49.53,103 | R6.2 49.53,103
CUR_SENSE_2
  Top 0.406: R1.1 29.08,82.67 R32.2 29.72,83.32 U$9.A3
CUR_SENSE_3
  Bottom 0.61: 49.53,36.7 49.53,33.02 43.92,33.02 40.57,36.37 CURRENT3.2 | IC6.5 50.29,37.47 49.53,36.7 | R48.2 49.53,36.7
CUR_SENSE_4
  Top 0.406: R78.1 29.08,16.37 R80.2 29.72,17.03 U$24.A3
DISCHARGE1
  Bottom 1.016: HV+UNFUSED.2 HV+UNFUSED.1 156.42,92.46 U$3.P$2 148.79,92.02 148.79,90.17 146.5,87.88 136.4,87.88 U$12.CONTACT1
DISCHARGE2
  Bottom 1.016: DISCH+.1 DISCH+.2 198.33,80.52 U$12.CONTACT2
DISCHARGE3
  Bottom 1.016: DISCH-.1 DISCH-.2 HV-UNFUSED.2 HV-UNFUSED.1 192.02,117.86 U$4.P$2
DISCHARGE4
  Bottom 1.016: DISCH+1.1 DISCH+1.2 198.33,14.22 U$18.CONTACT2
DISCHARGE5
  Bottom 1.016: HV+UNFUSED1.2 HV+UNFUSED1.1 156.42,26.16 U$20.P$2 148.79,25.72 148.79,23.88 146.5,21.59 136.4,21.59 U$18.CONTACT1
DISCHARGE6
  Bottom 1.016: DISCH-1.1 DISCH-1.2 HV-UNFUSED1.2 HV-UNFUSED1.1 192.02,51.56 U$21.P$2
EM_IO1
  Top 0.61: MAIN.9 31.5,112.63 31.5,101.85 36.07,97.28 36.07,90.9 38.32,88.65 46.35,88.65 48.9,86.11 48.9,84.14 EM.P$3
EM_IO2  (via drill 0.45, 0.6)
  Top 0.61: MAIN.10 28.01,111.95 30.23,109.73 30.23,101.09 v32.51,98.81 | v47.5,98.3 47.5,95 v50.04,92.46
  Bottom 0.61: EM.P$4 49.55,81.55 51.05,83.06 51.05,85.09 50.04,86.11 v50.04,92.46 | v32.51,98.81 36.58,98.81 37.08,98.3 v47.5,98.3
EM_IO3
  Top 0.61: MAIN1.9 31.5,46.34 31.5,35.56 36.07,30.99 36.07,24.61 38.32,22.35 46.35,22.35 48.9,19.81 48.9,17.85 EM1.P$3
EM_IO4  (via drill 0.45, 0.6)
  Top 0.61: MAIN1.10 28.01,45.65 30.23,43.43 30.23,34.8 v32.51,32.51 | v47.5,32 47.5,28.7 v50.04,26.16
  Bottom 0.61: EM1.P$4 49.55,15.26 51.05,16.76 51.05,18.8 50.04,19.81 v50.04,26.16 | v32.51,32.51 36.58,32.51 37.08,32 v47.5,32
GND  (via drill 0.4, 0.45, 0.5, 0.55, 0.75)
  Top 0.254: v23.37,87.77 22.33,87.77 C4.2
  Top 0.406: R4.2 R3.1 58.29,89.53 5KW_TRIM.3 | R5.2 50.47,90.84 50.15,90.84 | C8.1 C9.1 16.75,73.01 v16.76,73.03 | U$10.GND U$10.EN 40.77,79.76 41.27,80.26 v42.04,80.26 | 30.61,79.5 29.46,79.5 v29.08,79.88 R32.1 | 32.46,77.91 U$11.2 32.38,77.72 30.61,79.5 | R31.2 46.98,76.45 v49.02,76.45 | 33.02,79.5 30.61,79.5 | 33.02,79.5 v33.53,78.99 | U$7.2 8.51,74.8 7.87,75.44 7.01,75.44 v6.75,75.69 | v7.37,82.8 9.03,82.8 R30.1 | R7.1 14.09,81.03 14.73,81.03 | 14.73,81.03 15.27,80.49 17.24,80.49 20.26,77.47 24,77.47 v24.38,77.85 | R39.1 16.12,82.41 14.73,81.03 | R43.1 32.64,79.88 33.02,79.5
  Top 0.61: IC1.2 53.98,105.54 58.67,110.24 | CURRENT2.4 50.15,90.84 52.98,88.01 5KW_TRIM.3 | v60.2,74.93 62.99,72.14 v65.28,72.14 | CURRENT1.4 40.32,108.41 42.14,110.24 58.67,110.24 | 58.67,110.24 v59.18,110.74
  Bottom 0.254: U$8.14 U$8.13 | U$8.14 21.71,80.66 22.86,79.5 25.91,79.5 | U$8.14 21.72,81.44 21.72,82.22 22.3,82.8 23.37,82.8 | 23.37,82.8 R34.2 | 23.37,82.8 v23.37,87.77
  Bottom 0.406: TRIM-.2 U$5.8SENSE- 64.64,110.13 | IC3.4 62.23,103.76 62.99,104.52 | IC2.4 61.91,91.25 58.67,88.01 | C3.2 52.84,100.09 IC1.2 | 6.66,72.44 6.75,72.54 v6.75,75.69 6.75,82.19 v7.37,82.8 | v49.02,76.45 48.39,75.82 48.13,75.82 | v33.53,78.99 35.69,76.58 | v24.38,77.85 24.38,77.98 25.91,79.5 28.7,79.5 v29.08,79.88 | v16.76,73.03 16.64,73.03 16.07,72.45 | v42.04,80.26 42.16,80.26 43.43,78.99
  Bottom 0.61: 5KW_TRIM.3 58.67,88.01 58.67,82.3 | 57.4,81.03 58.67,82.3 | U$5.9VOUT- 64.77,116.59 | U$5.9VOUT- 70.36,110.87 70.36,75.44 | 70.36,75.44 70.36,73.79 72.01,72.14 | D2.A 70.36,75.44 | U$5.9VOUT- 64.64,110.13 62.99,108.48 62.99,104.52 | 58.67,82.3 59.44,81.53 59.44,75.69 v60.2,74.93 | v59.18,110.74 64.64,116.2 U$5.9VOUT- | 57.4,81.03 54.1,81.03 52.58,79.5 49.02,79.5 | POWER.2 35.58,93.47 41.91,93.47 44.01,95.57 CURRENT2.4 | U$9.GND 6.66,70.05 6.66,72.44 7.49,73.28 15.24,73.28 16.07,72.45 16.64,71.88 27.69,71.88 28.45,72.64 30.73,72.64 33.53,75.44 34.54,75.44 35.69,76.58 38.1,78.99 43.43,78.99 44.45,77.98 47.5,77.98 | 72.01,72.14 v65.28,72.14 | IMD.P$3 IMD.P$2 50.42,73.53 48.13,75.82 47.5,76.45 47.5,77.98 | EM.P$2 46.48,81.03 48.01,79.5 49.02,79.5 | IMD.P$4 57.4,79.25 57.4,81.03 | 47.5,77.98 49.02,79.5 | U$12.COIL- 140.72,69.34 74.81,69.34 72.01,72.14
GND1
  pour Bottom (isolate 0.305): 0.1,159.57 75.1,159.57 75.1,132.62 0.1,132.62
GND2
  pour Bottom (isolate 0.305): 0.1,188.53 75.1,188.53 75.1,161.58 0.1,161.58
GND3  (via drill 0.4, 0.45, 0.5, 0.55, 0.75)
  Top 0.254: v23.37,21.47 22.33,21.47 C10.2
  Top 0.406: R46.2 R45.1 58.29,23.24 5KW_TRIM1.3 | R49.2 50.47,24.55 50.15,24.55 | C6.1 C7.1 v16.75,6.72 v16.76,6.73 | U$25.GND U$25.EN 40.77,13.46 41.27,13.97 v42.04,13.97 | 30.61,13.21 29.46,13.21 v29.08,13.59 R80.1 | 32.46,11.62 U$26.2 32.38,11.43 30.61,13.21 | R71.2 46.98,10.16 v49.02,10.16 | 33.02,13.21 30.61,13.21 | 33.02,13.21 v33.53,12.7 | U$22.2 8.51,8.51 7.87,9.14 7.01,9.14 v6.75,9.4 | v7.37,16.51 9.03,16.51 R70.1 | R42.1 14.09,14.73 14.73,14.73 | 14.73,14.73 15.27,14.2 17.24,14.2 20.26,11.18 24,11.18 v24.38,11.56 | R83.1 16.12,16.12 14.73,14.73 | R81.1 32.64,13.59 33.02,13.21
  Top 0.61: IC4.2 53.98,39.24 58.67,43.94 | CURRENT4.4 50.15,24.55 52.98,21.72 5KW_TRIM1.3 | v60.2,8.64 62.99,5.84 v65.28,5.84 | CURRENT3.4 40.32,42.12 42.14,43.94 58.67,43.94 | 58.67,43.94 v59.18,44.45
  Bottom 0.254: U$23.14 U$23.13 | U$23.14 21.71,14.36 22.86,13.21 25.91,13.21 | U$23.14 21.72,15.15 21.72,15.93 22.3,16.51 23.37,16.51 | 23.37,16.51 R73.2 | 23.37,16.51 v23.37,21.47
  Bottom 0.406: TRIM-1.2 U$19.8SENSE- 64.64,43.83 | IC6.4 62.23,37.47 62.99,38.23 | IC5.4 61.91,24.95 58.67,21.72 | C2.2 52.84,33.79 IC4.2 | 6.66,6.15 6.75,6.25 v6.75,9.4 6.75,15.9 v7.37,16.51 | v49.02,10.16 48.39,9.53 48.13,9.53 | v33.53,12.7 35.69,10.29 | v24.38,11.56 24.38,11.68 25.91,13.21 28.7,13.21 v29.08,13.59 | v16.76,6.73 16.64,6.73 16.07,6.16 | v42.04,13.97 42.16,13.97 43.43,12.7